# Altium PCB SPINNER_TWIN_STARS.PcbDoc (part 1 of 3)
Units mm, origin at the board's own origin, x right, y up, seen from the top; angles counter-clockwise.
Board outline 105 x 72 mm, 4 copper layers (Top_Elec, Mid Top Layer, Mid Bottom Layer, Bottom_GND), stack 0.742 mm thick; 199 components, 124 nets, 594 pads, 799 vias.
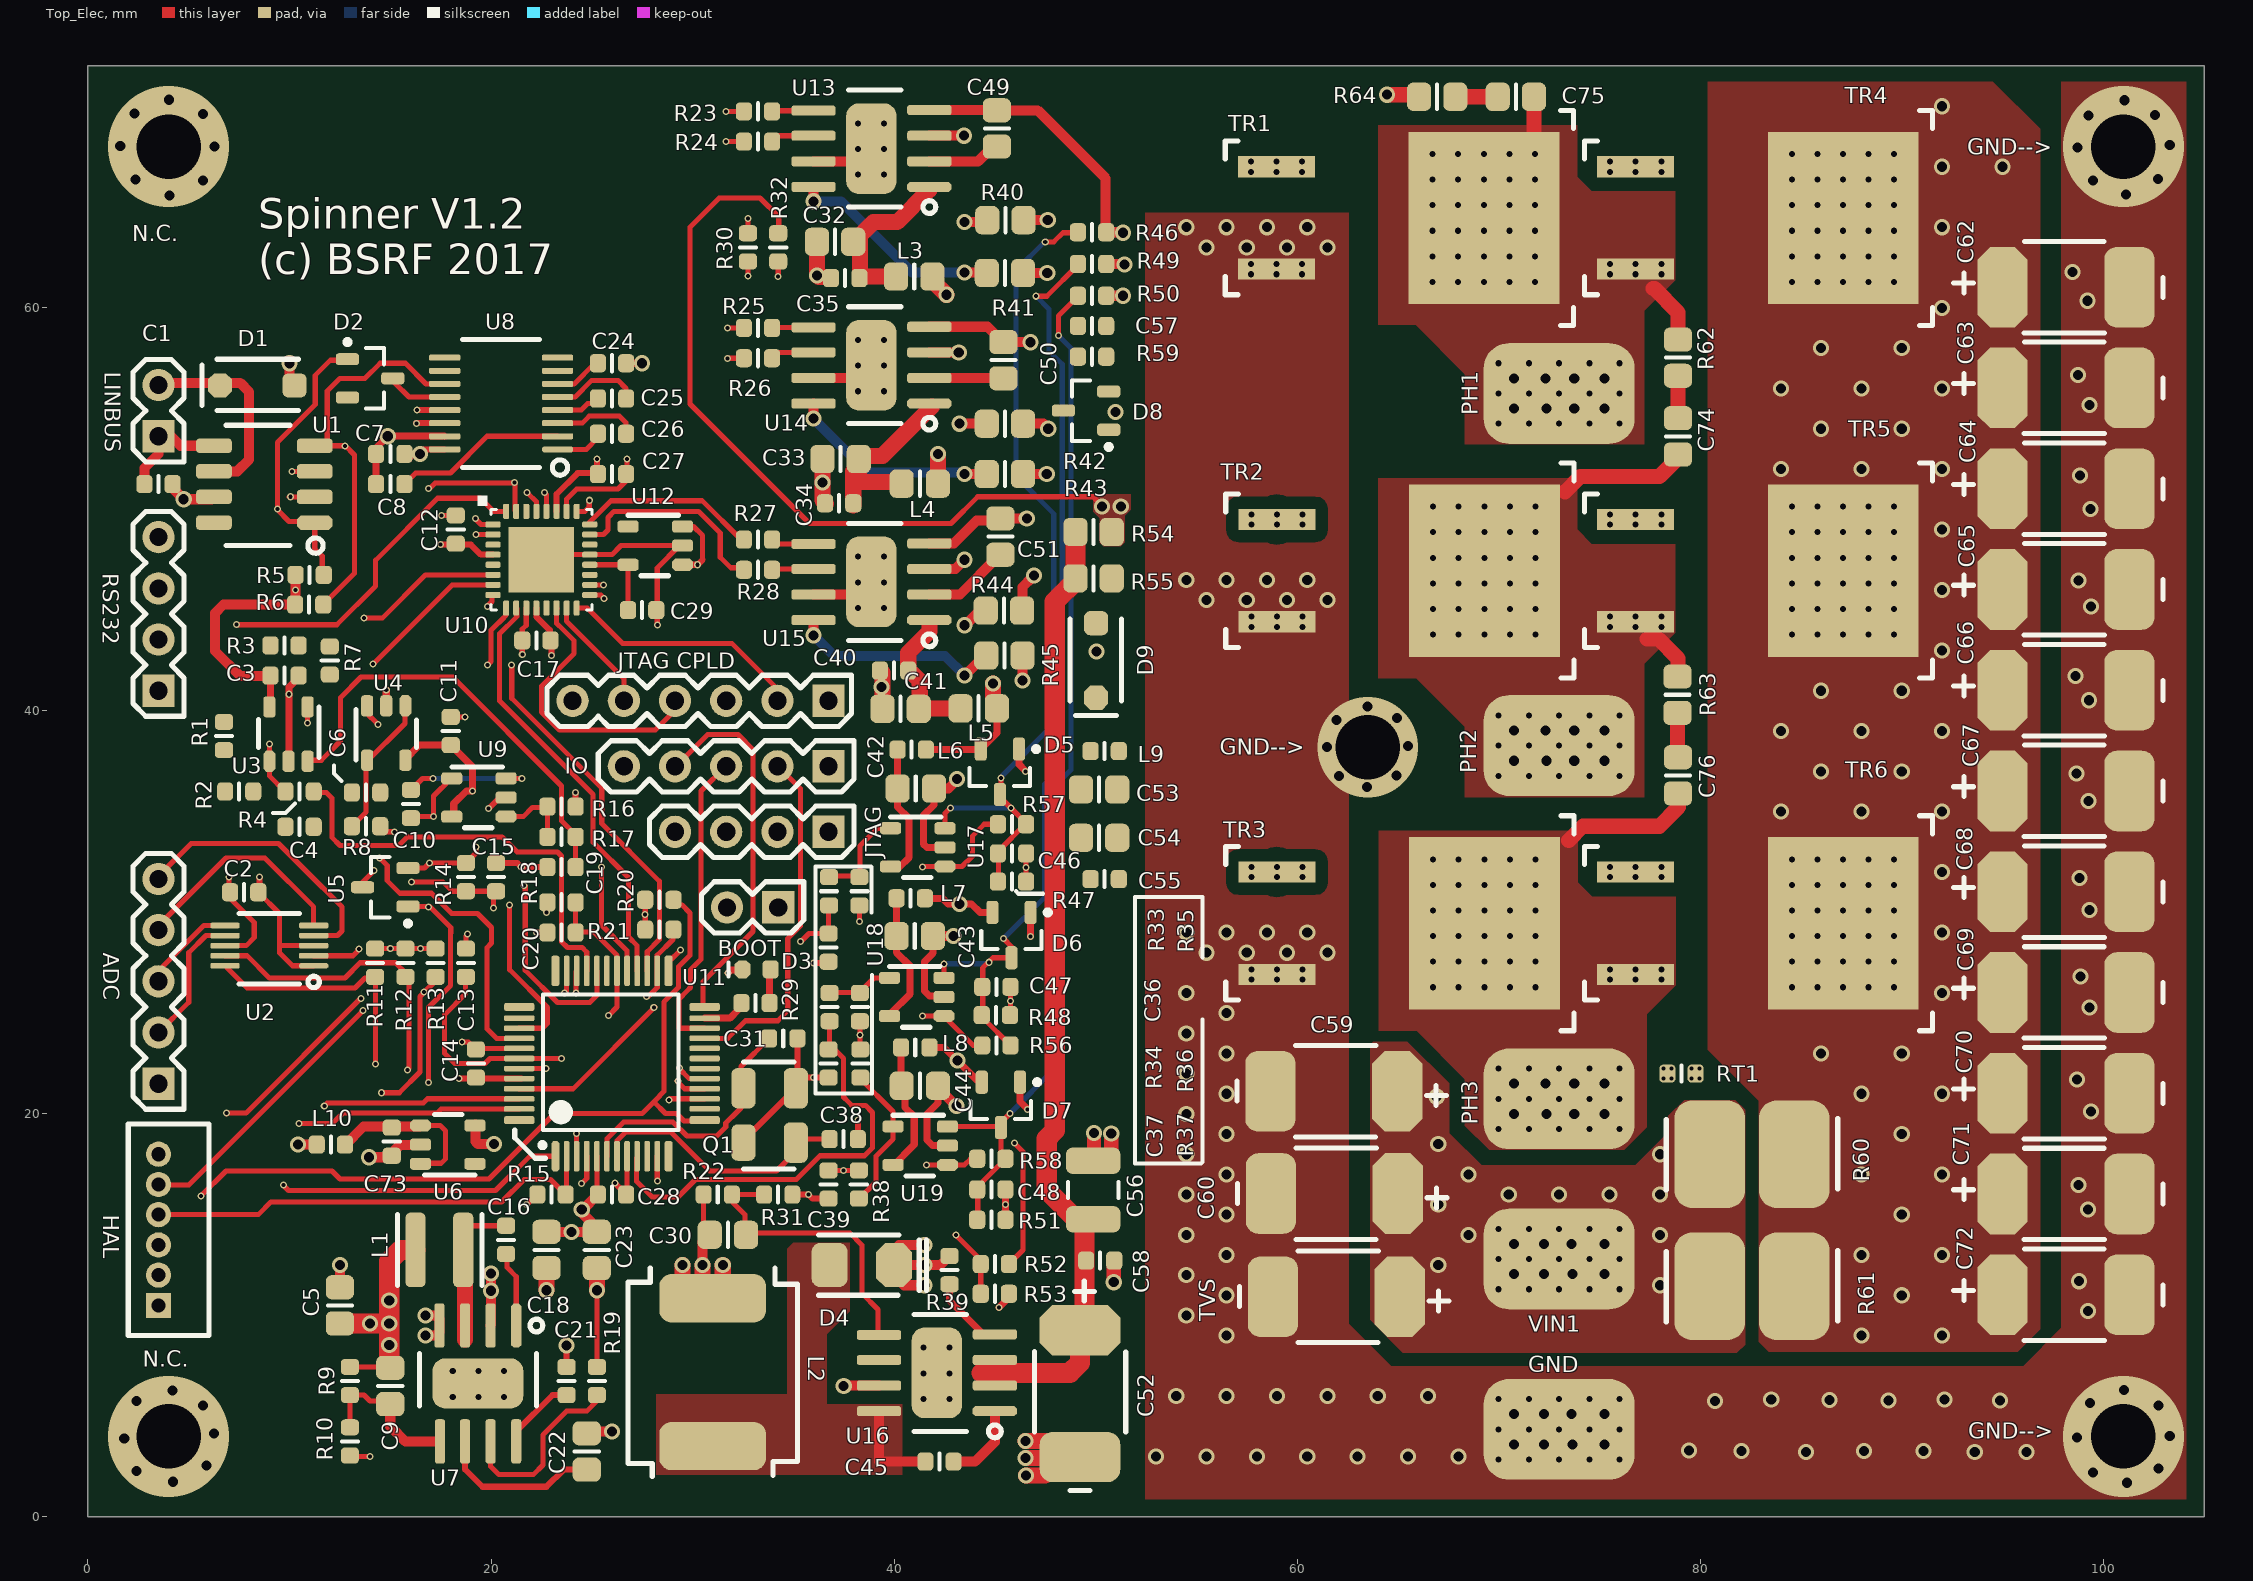
[diagram p0: Top_Elec view]
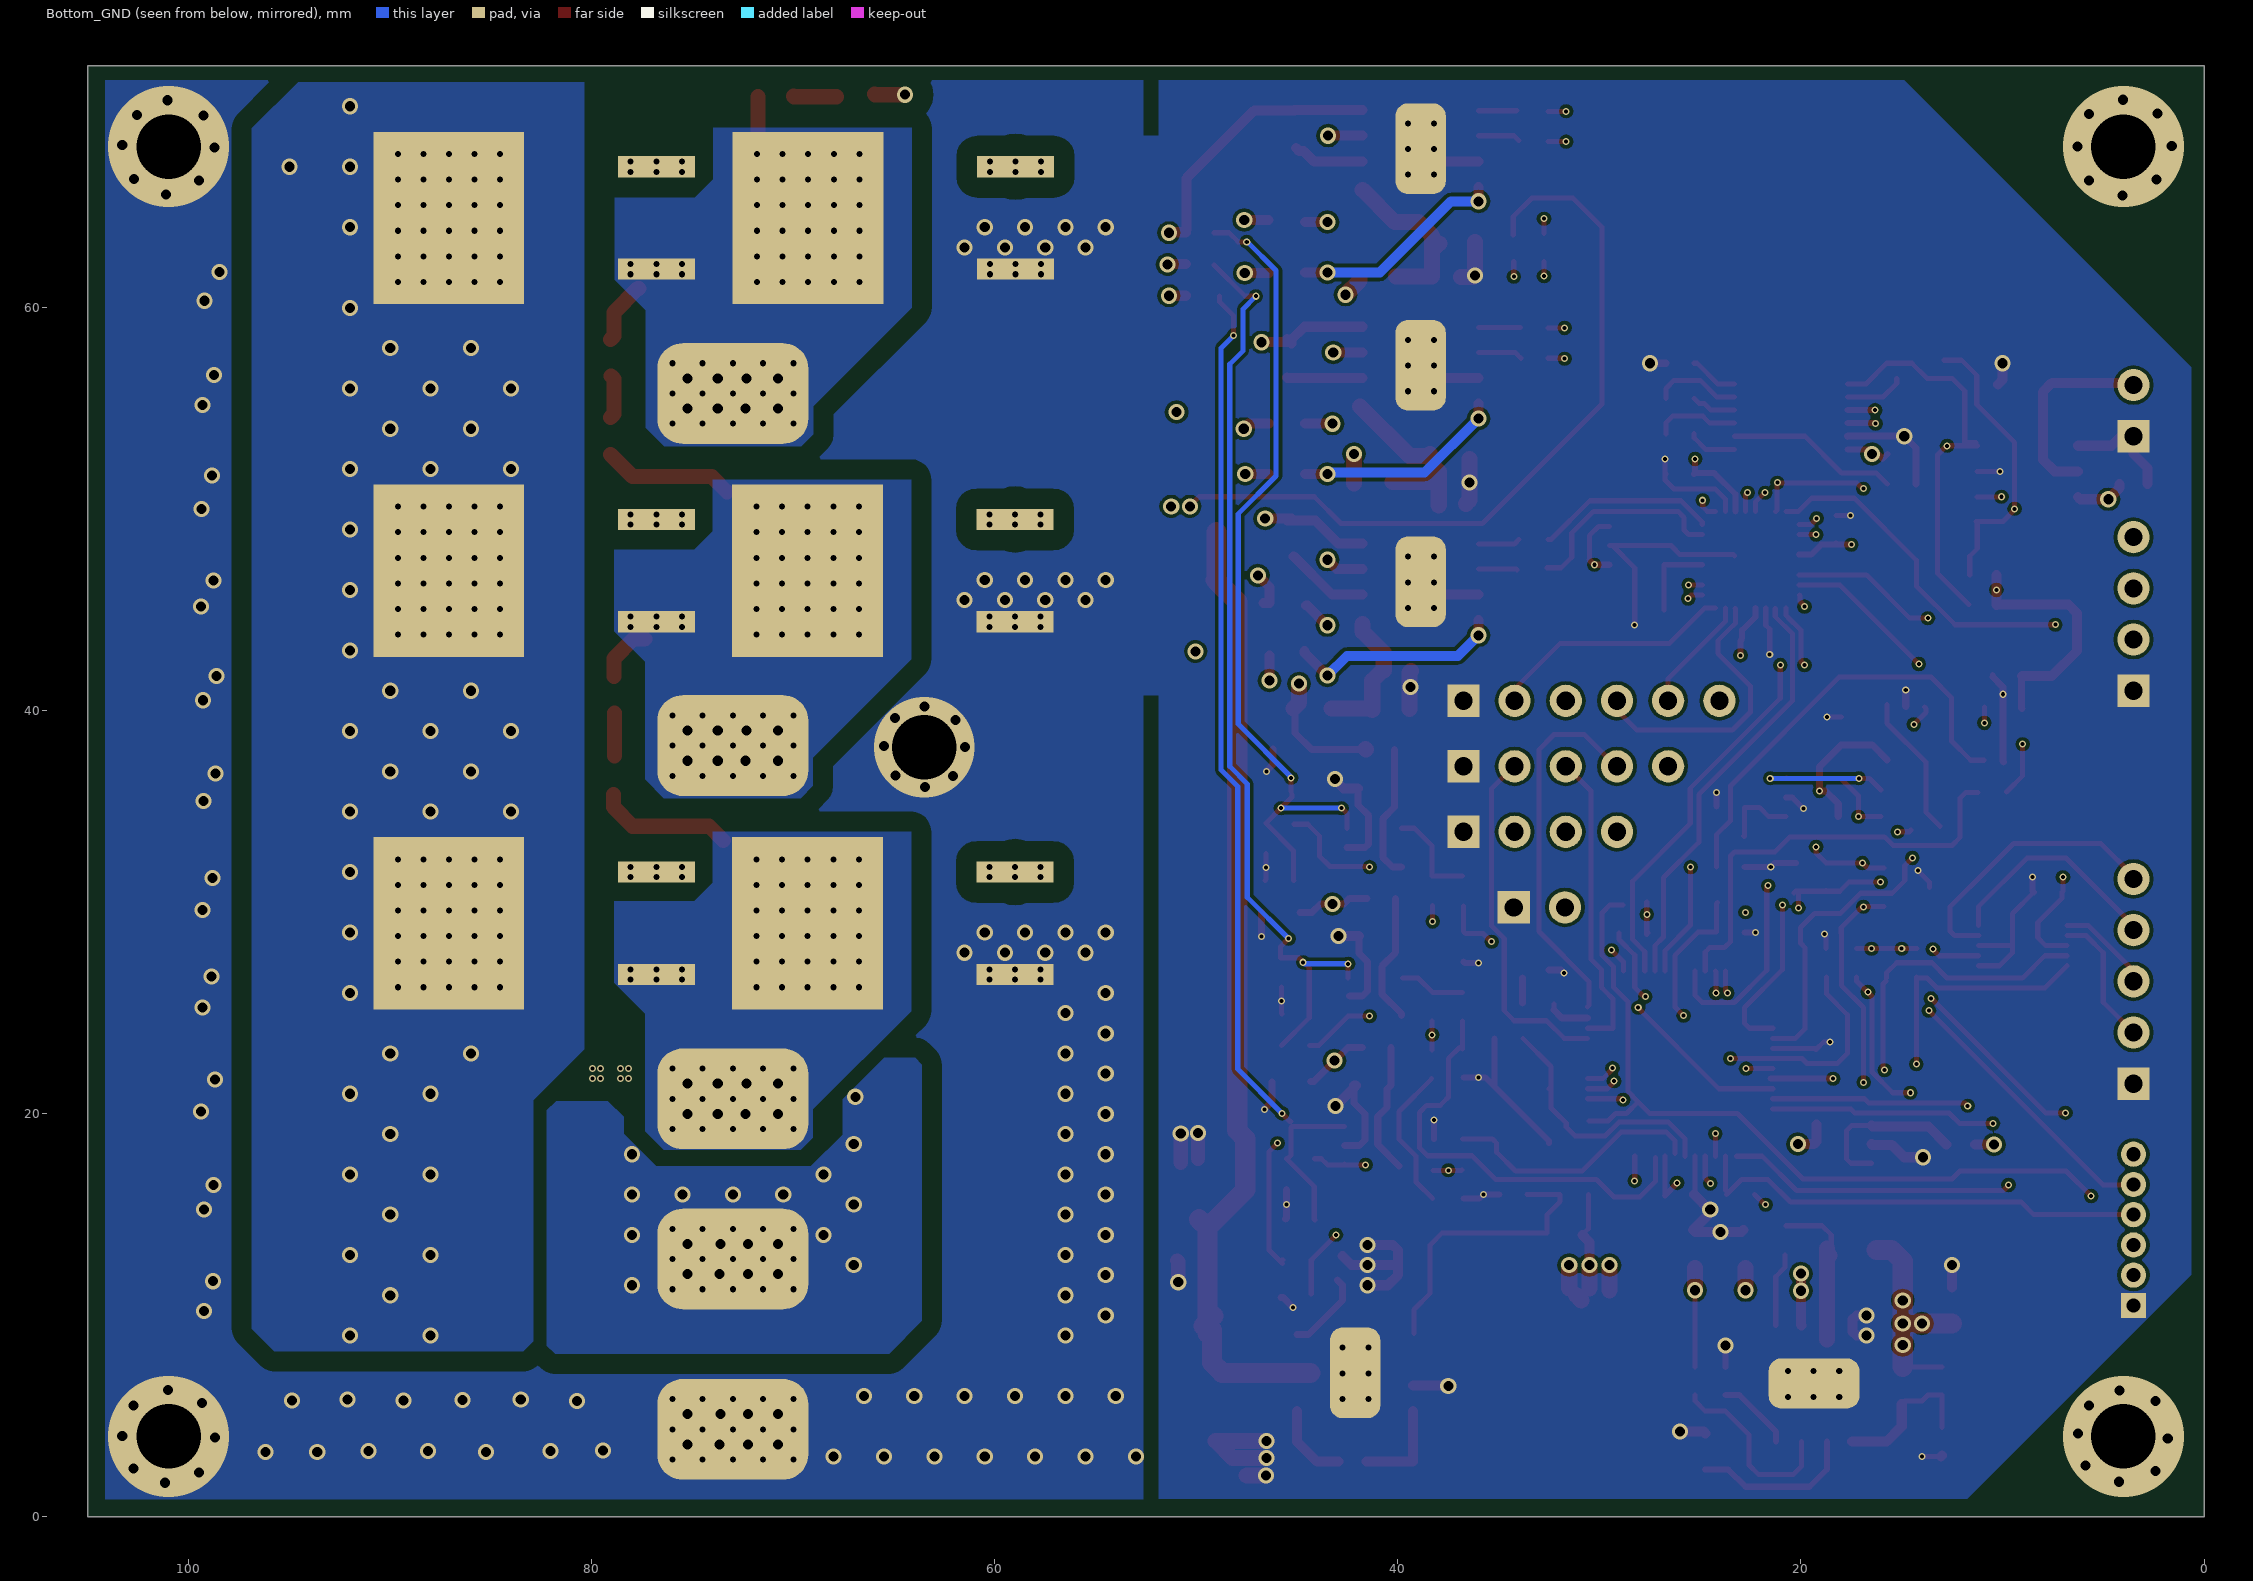
[diagram p1: Bottom_GND view, seen from below]
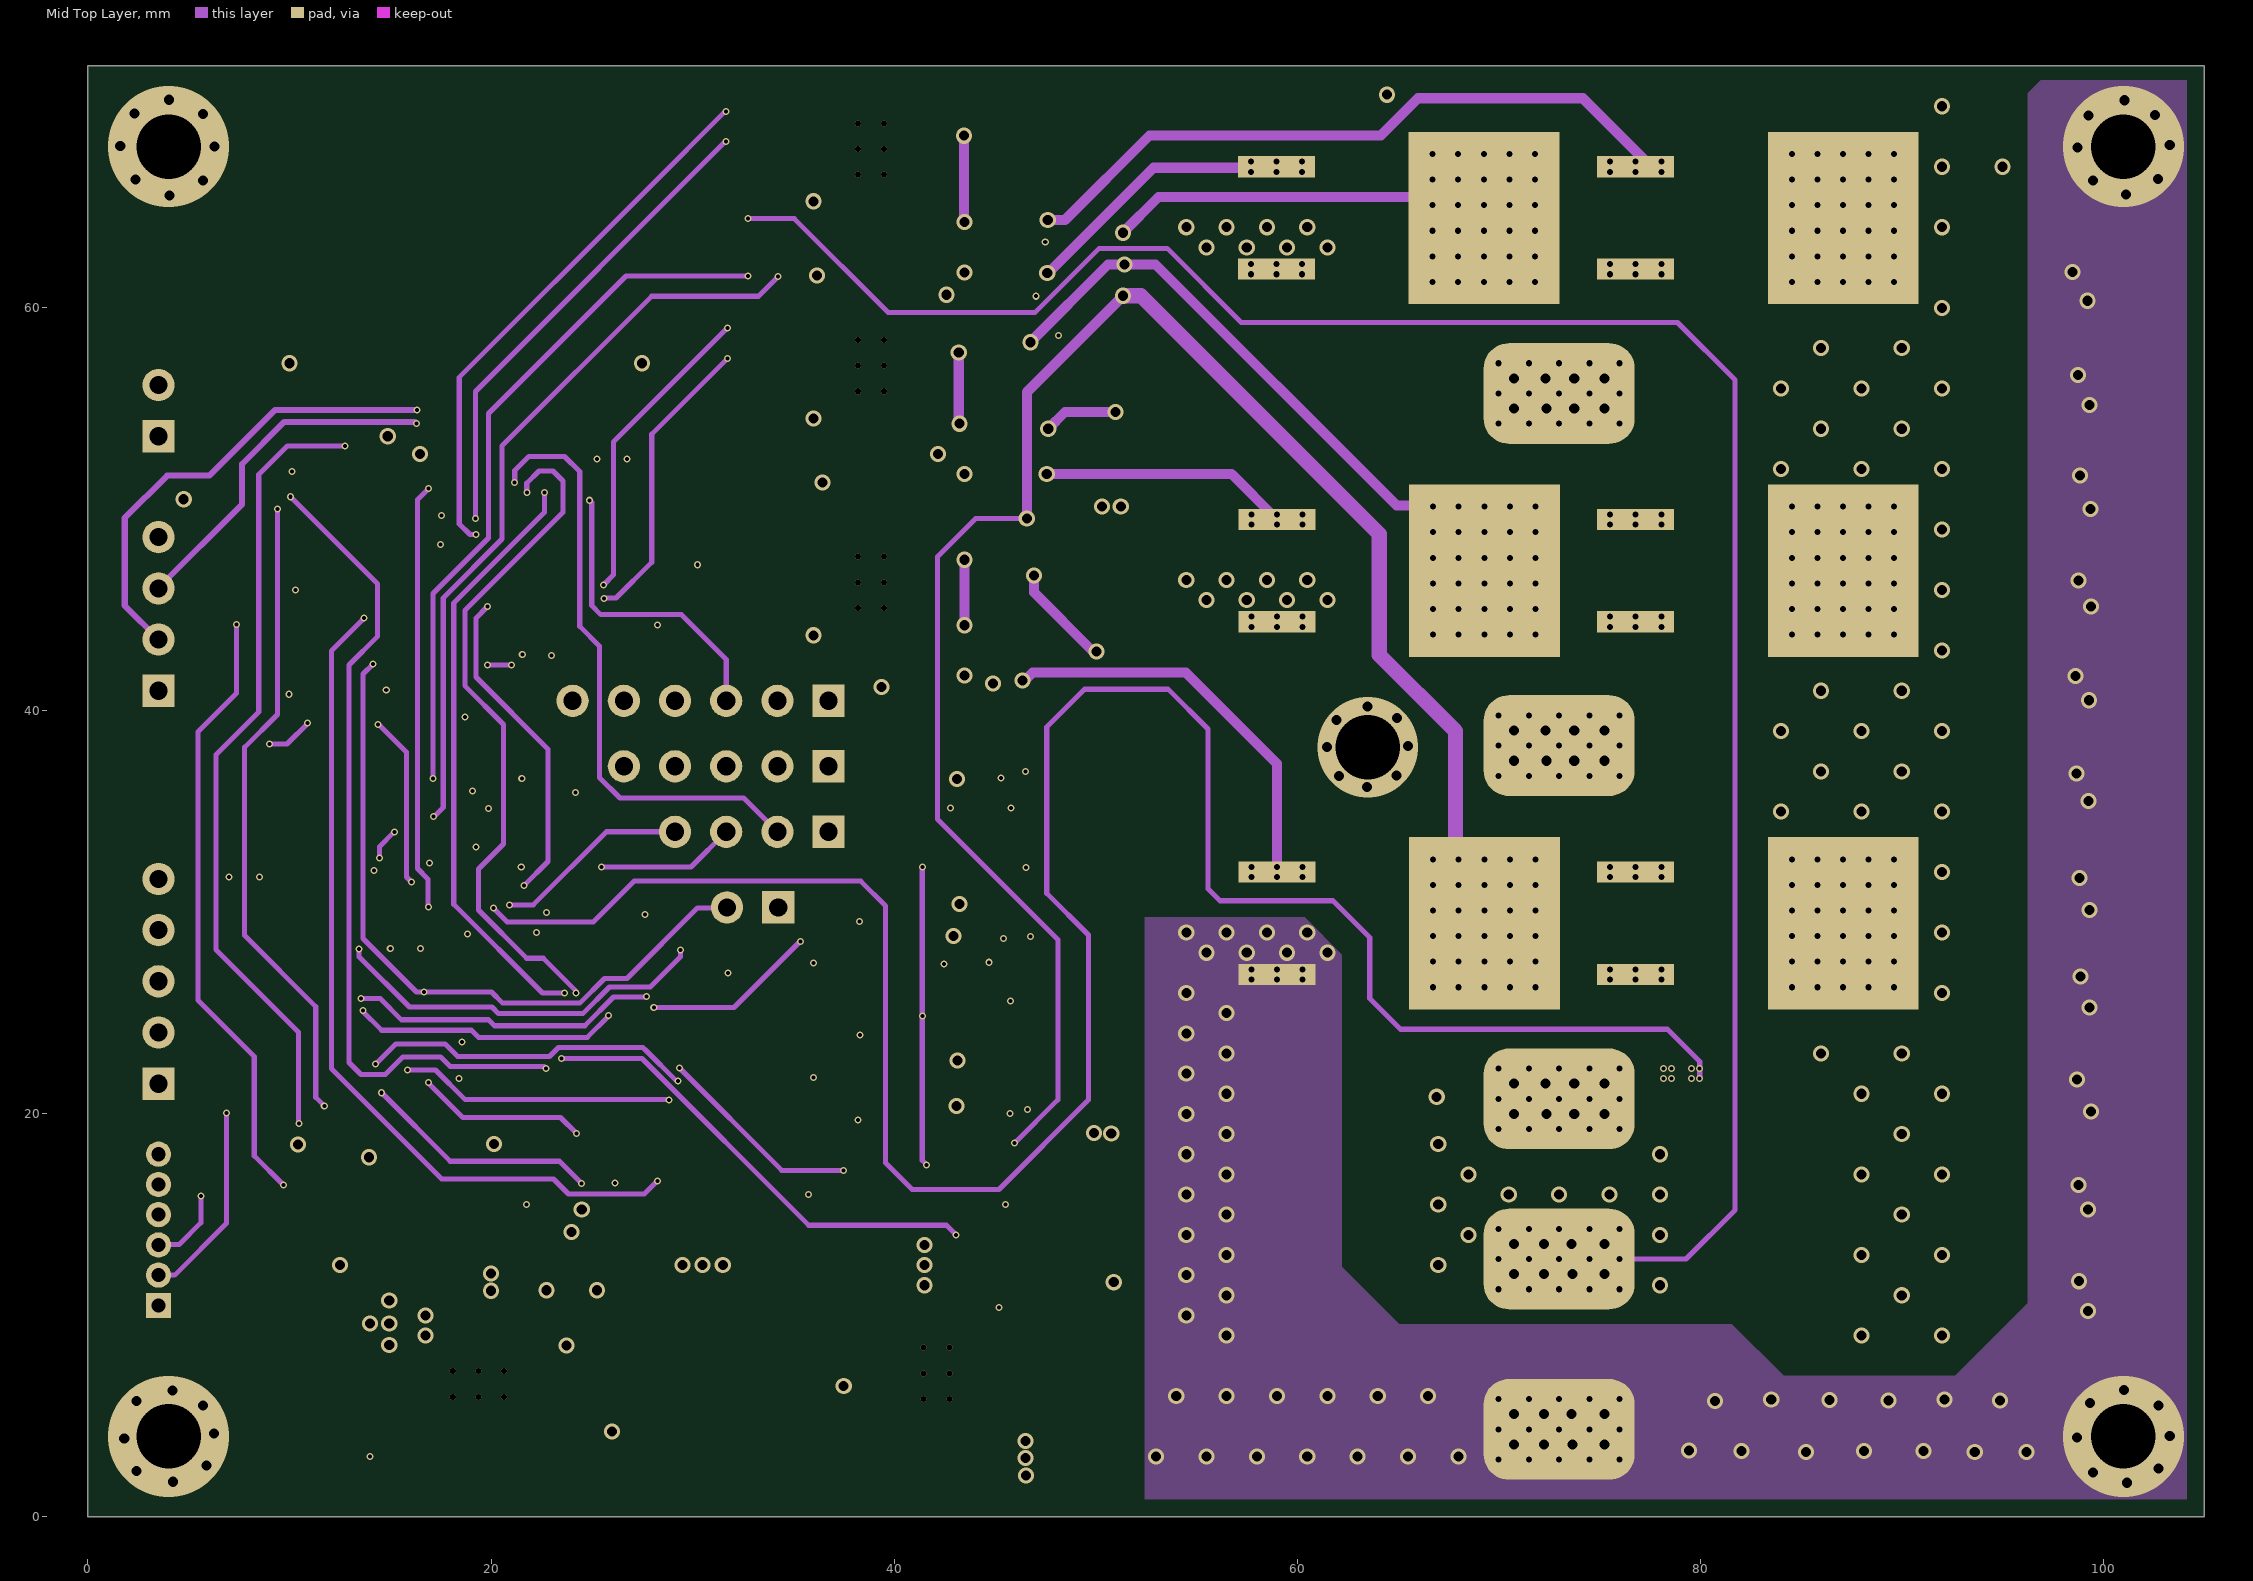
[diagram p2: Mid Top Layer]
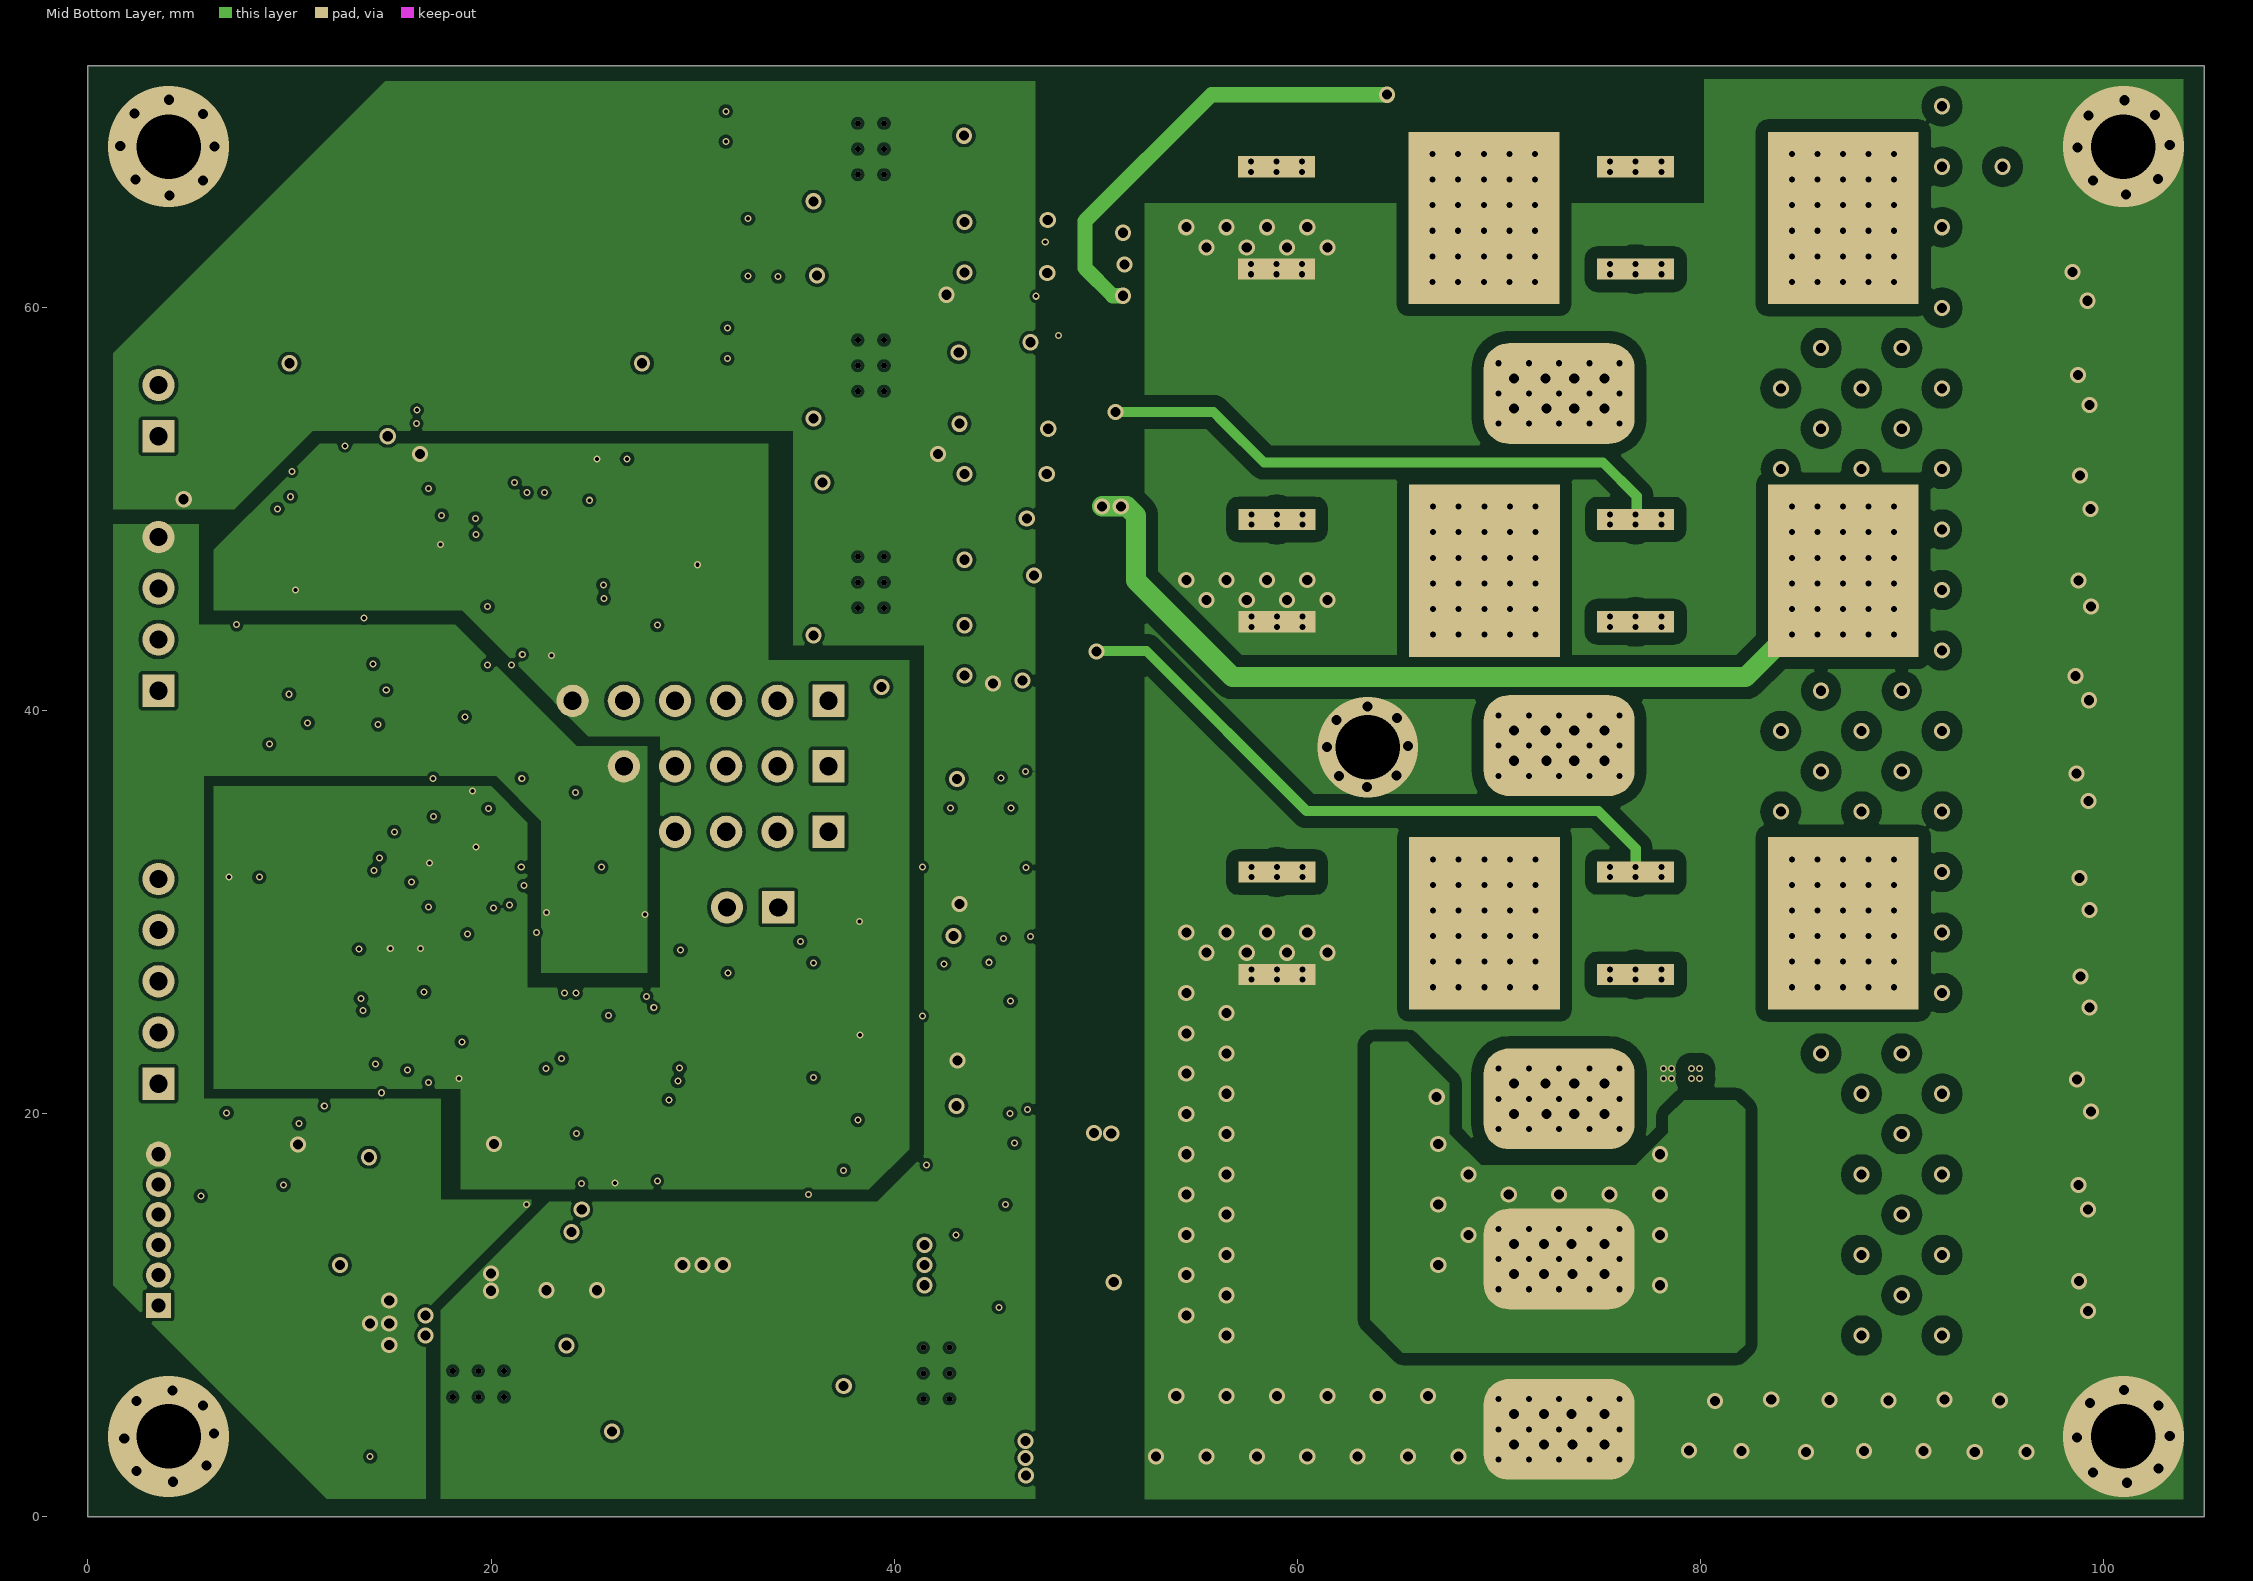
[diagram p3: Mid Bottom Layer]

## Layer stack, top to bottom
Top Solder Resist: solder mask 0.0102, Solder Resist, Dk 3.5
Top_Elec: signal copper 0.0175
Dielectric 1: core 0.254, FR-4, Dk 4.2
Mid Top Layer: signal copper 0.036
Dielectric 3: prepreg 0.127, FR-4, Dk 4.2
Mid Bottom Layer: signal copper 0.036
Dielectric 2: core 0.254, FR-4, Dk 4.2
Bottom_GND: signal copper 0.0175
Bottom Solder Resist: solder mask 0.0102, Solder Resist, Dk 3.5

## Board outline
0,0 105,0 105,72 0,72

## Design rules (kind name [scope] priority, off if disabled: settings)
Clearance BottomGND1 [InNamedPolygon('Bottom_GND1')] p1: gap=1 ignorepadtopadclearanceinfootprint=FALSE
Clearance Clearance_21 [InNamedPolygon('Bottom_GND1')] p2: gap=0.254 ignorepadtopadclearanceinfootprint=FALSE except(0: Arc-Hole Track-Hole SMDPad-Hole THPad-Hole Via-Hole Fill-Hole Poly-Hole Region-Hole Text-Hole)
Clearance Clearance_20 [InNamedPolygon('Bottom_GND1')] p3: gap=0.254 ignorepadtopadclearanceinfootprint=FALSE except(0: Arc-Hole Track-Hole SMDPad-Hole THPad-Hole Via-Hole Fill-Hole Poly-Hole Region-Hole Text-Hole)
Clearance Clearance_19 [InNamedPolygon('Bottom_GND1')] p4: gap=0.254 ignorepadtopadclearanceinfootprint=FALSE except(0: Arc-Hole Track-Hole SMDPad-Hole THPad-Hole Via-Hole Fill-Hole Poly-Hole Region-Hole Text-Hole)
Clearance Clearance_18 [InNamedPolygon('Mid_Bottom_GND1')] p5: gap=0.6 ignorepadtopadclearanceinfootprint=FALSE
Clearance Clearance_17 [InNamedPolygon('Top Elec-GND')] p6: gap=0.6 ignorepadtopadclearanceinfootprint=FALSE
Clearance Clearance_16 [InNamedPolygon('Mid_Bottom_GND1')] p7: gap=1 ignorepadtopadclearanceinfootprint=FALSE
Clearance Clearance_15 [InNamedPolygon('Mid_Bottom_GND1')] p8: gap=0.254 ignorepadtopadclearanceinfootprint=FALSE except(0: Arc-Hole Track-Hole SMDPad-Hole THPad-Hole Via-Hole Fill-Hole Poly-Hole Region-Hole Text-Hole)
Clearance Clearance_14 [InNamedPolygon('Mid Top GND')] p9: gap=0.5 ignorepadtopadclearanceinfootprint=FALSE
Clearance Clearance_13 [InNamedPolygon('Mid Bottom GND')] p10: gap=0.5 ignorepadtopadclearanceinfootprint=FALSE
Clearance Clearance_12 [InNamedPolygon('Mid Bottom GND')] p11: gap=0.5 ignorepadtopadclearanceinfootprint=FALSE
Clearance Clearance_11 [InNamedPolygon('GND')] p12: gap=0.254 ignorepadtopadclearanceinfootprint=FALSE except(0: Arc-Hole Track-Hole SMDPad-Hole THPad-Hole Via-Hole Fill-Hole Poly-Hole Region-Hole Text-Hole)
Clearance Clearance_10 [InNamedPolygon('GND')] p13: gap=0.254 ignorepadtopadclearanceinfootprint=FALSE
Clearance Clearance_9 [InNamedPolygon('GND')] p14: gap=0.5 ignorepadtopadclearanceinfootprint=FALSE
Clearance Clearance_8 [InNamedPolygon('GND')] p15: gap=1 ignorepadtopadclearanceinfootprint=FALSE
Clearance Clearance_7 [InNamedPolygon('PH2')] p16: gap=0.254 ignorepadtopadclearanceinfootprint=FALSE except(0: Arc-Hole Track-Hole SMDPad-Hole THPad-Hole Via-Hole Fill-Hole Poly-Hole Region-Hole Text-Hole)
Clearance Clearance_6 [InNamedPolygon('VIN')] p17: gap=0.254 ignorepadtopadclearanceinfootprint=FALSE except(0: Arc-Hole Track-Hole SMDPad-Hole THPad-Hole Via-Hole Fill-Hole Poly-Hole Region-Hole Text-Hole)
Clearance Clearance_5 [All] p18: gap=0.17 ignorepadtopadclearanceinfootprint=FALSE
Clearance Clearance_4 [InNamedPolygon('P48V') Or  InNamedPolygon('GND') Or  InNamedPolygon('PH3') Or  InNamedPolygon('PH3') Or  InNamedPolygon('PH1')] p19: gap=0.7 ignorepadtopadclearanceinfootprint=TRUE
Clearance Clearance_3 [InNamedPolygon('Top 48V') Or  InNamedPolygon('Mid Bottom P5V') Or  InNamedPolygon('PH3') Or  InNamedPolygon('PH3') Or  InNamedPolygon('PH1')] p20: gap=0.75 ignorepadtopadclearanceinfootprint=FALSE
Clearance Clearance_2 [InNamedPolygon('Top 48V') Or  InNamedPolygon('Mid Bottom P5V') Or  InNamedPolygon('PH1')] p21: gap=1 ignorepadtopadclearanceinfootprint=FALSE
Clearance Clearance_1 [InNamedPolygon('Mid Bottom P5V')] p22: gap=0.254 ignorepadtopadclearanceinfootprint=FALSE except(0: Arc-Hole Track-Hole SMDPad-Hole THPad-Hole Via-Hole Fill-Hole Poly-Hole Region-Hole Text-Hole)
Clearance CopperToBoard [InPolygon vs (IsTrack Or IsArc) And OnLayer('Keep-out Layer')] p23: gap=0.305 ignorepadtopadclearanceinfootprint=FALSE
Clearance ViaToCopper [IsVia vs InPolygon] p24: gap=0.305 ignorepadtopadclearanceinfootprint=FALSE
Clearance ViaToVia [IsVia vs IsVia] p25: gap=0.305 ignorepadtopadclearanceinfootprint=FALSE
Clearance PadToCopper [IsPad vs InPolygon] p26: gap=0.2 ignorepadtopadclearanceinfootprint=FALSE
Clearance PadToVia [IsPad vs IsVia] p27: gap=0.305 ignorepadtopadclearanceinfootprint=FALSE
Clearance PadToPad [IsPad vs IsPad] p28: gap=0.1 ignorepadtopadclearanceinfootprint=FALSE
Clearance RouteToPad_1 [IsTrack or IsArc vs IsVia] p29: gap=0.305 ignorepadtopadclearanceinfootprint=FALSE
Clearance RouteToPad [IsTrack Or IsArc vs IsPad] p30: gap=0.305 ignorepadtopadclearanceinfootprint=FALSE
Clearance RouteToRoute [IsTrack or IsArc vs IsTrack or IsArc] p31: gap=0.305 ignorepadtopadclearanceinfootprint=FALSE
Clearance [All] p32: gap=0.254 ignorepadtopadclearanceinfootprint=FALSE except(0: Arc-Hole Track-Hole SMDPad-Hole THPad-Hole Via-Hole Fill-Hole Poly-Hole Region-Hole Text-Hole)
ComponentClearance [All] p1: gap=0.2 collisioncheckmode=3 verticalgap=0.254 showdistances=TRUE
PolygonConnect PolygonConnect_43 [All] p1: connectstyle=Direct reliefconductorwidth=0.254 reliefentries=4 polygonreliefangle="90 Angle" airgapwidth=0.254
PolygonConnect PolygonConnect_42 [All vs IsNamedPolygon('Top Elec-GND')] p2: connectstyle=Direct reliefconductorwidth=0.254 reliefentries=4 polygonreliefangle="90 Angle" airgapwidth=0.254
PolygonConnect PolygonConnect_41 [All vs IsNamedPolygon('Top Elec-GND')] p3: connectstyle=Direct reliefconductorwidth=0.254 reliefentries=4 polygonreliefangle="90 Angle" airgapwidth=0.254
PolygonConnect PolygonConnect_40 [All vs IsNamedPolygon('Mid Top P48V')] p4: connectstyle=Direct reliefconductorwidth=0.254 reliefentries=4 polygonreliefangle="90 Angle" airgapwidth=0.254
PolygonConnect PolygonConnect_39 [All vs IsNamedPolygon('Mid Top Vin')] p5: connectstyle=Direct reliefconductorwidth=0.254 reliefentries=4 polygonreliefangle="90 Angle" airgapwidth=0.254
PolygonConnect PolygonConnect_38 [All vs IsNamedPolygon('Mid Top GND')] p6: connectstyle=Direct reliefconductorwidth=0.254 reliefentries=4 polygonreliefangle="90 Angle" airgapwidth=0.254
PolygonConnect PolygonConnect_37 [All vs IsNamedPolygon('Mid Bottom GND')] p7: connectstyle=Direct reliefconductorwidth=0.254 reliefentries=4 polygonreliefangle="90 Angle" airgapwidth=0.254
PolygonConnect PolygonConnect_36 [All vs IsNamedPolygon('Top Elec-98')] p8: connectstyle=Direct reliefconductorwidth=0.254 reliefentries=4 polygonreliefangle="90 Angle" airgapwidth=0.254
PolygonConnect PolygonConnect_35 [All vs IsNamedPolygon('Mid Bottom GND')] p9: connectstyle=Direct reliefconductorwidth=0.254 reliefentries=4 polygonreliefangle="90 Angle" airgapwidth=0.254
PolygonConnect PolygonConnect_34 [All vs IsNamedPolygon('Bottom_GNDVin')] p10: connectstyle=Direct reliefconductorwidth=0.254 reliefentries=4 polygonreliefangle="90 Angle" airgapwidth=0.254
PolygonConnect PolygonConnect_33 [All vs IsNamedPolygon('Bottom_GNDVin')] p11: connectstyle=Direct reliefconductorwidth=0.254 reliefentries=4 polygonreliefangle="90 Angle" airgapwidth=0.254
PolygonConnect PolygonConnect_32 [All vs IsNamedPolygon('Mid Bottom PH3')] p12: connectstyle=Direct reliefconductorwidth=0.254 reliefentries=4 polygonreliefangle="90 Angle" airgapwidth=0.254
PolygonConnect PolygonConnect_31 [All vs IsNamedPolygon('Mid Bottom PH2')] p13: connectstyle=Direct reliefconductorwidth=0.254 reliefentries=4 polygonreliefangle="90 Angle" airgapwidth=0.254
PolygonConnect PolygonConnect_30 [All vs IsNamedPolygon('Mid Bottom PH1')] p14: connectstyle=Direct reliefconductorwidth=0.254 reliefentries=4 polygonreliefangle="90 Angle" airgapwidth=0.254
PolygonConnect PolygonConnect_29 [All vs IsNamedPolygon('Mid Bottom P48V')] p15: connectstyle=Direct reliefconductorwidth=0.254 reliefentries=4 polygonreliefangle="90 Angle" airgapwidth=0.254
PolygonConnect PolygonConnect_28 [All vs IsNamedPolygon('GND_L03_P035')] p16: connectstyle=Direct reliefconductorwidth=0.254 reliefentries=4 polygonreliefangle="90 Angle" airgapwidth=0.254
PolygonConnect PolygonConnect_27 [All vs IsNamedPolygon('GND_L03_P035')] p17: thpad.connectstyle=NoConnect thpad.reliefconductorwidth=0.254 thpad.reliefentries=4 thpad.polygonreliefangle="90 Angle" thpad.airgapwidth=0.254 smdpad.connectstyle=Direct smdpad.reliefconductorwidth=0.254 smdpad.reliefentries=4 smdpad.polygonreliefangle="90 Angle" smdpad.airgapwidth=0.254 via.connectstyle=Direct via.reliefconductorwidth=0.254 via.reliefentries=4 via.polygonreliefangle="90 Angle" via.airgapwidth=0.254
PolygonConnect PolygonConnect_26 [All vs IsNamedPolygon('Mid Bottom P3.3V')] p18: connectstyle=Direct reliefconductorwidth=0.254 reliefentries=4 polygonreliefangle="90 Angle" airgapwidth=0.254
PolygonConnect PolygonConnect_25 [All vs IsNamedPolygon('Mid Bottom P12V')] p19: connectstyle=Direct reliefconductorwidth=0.254 reliefentries=4 polygonreliefangle="90 Angle" airgapwidth=0.254
PolygonConnect PolygonConnect_24 [All vs IsNamedPolygon('PH1')] p20: connectstyle=Direct reliefconductorwidth=0.254 reliefentries=4 polygonreliefangle="90 Angle" airgapwidth=0.254
PolygonConnect PolygonConnect_23 [All vs IsNamedPolygon('PH1')] p21: connectstyle=Direct reliefconductorwidth=0.254 reliefentries=4 polygonreliefangle="90 Angle" airgapwidth=0.254
PolygonConnect PolygonConnect_22 [All vs IsNamedPolygon('GND')] p22: connectstyle=Direct reliefconductorwidth=0.254 reliefentries=4 polygonreliefangle="90 Angle" airgapwidth=0.254
PolygonConnect PolygonConnect_21 [All vs IsNamedPolygon('GND')] p23: thpad.connectstyle=Relief thpad.reliefconductorwidth=0.254 thpad.reliefentries=4 thpad.polygonreliefangle="90 Angle" thpad.airgapwidth=0.254 smdpad.connectstyle=Direct smdpad.reliefconductorwidth=0.254 smdpad.reliefentries=4 smdpad.polygonreliefangle="90 Angle" smdpad.airgapwidth=0.254 via.connectstyle=Direct via.reliefconductorwidth=0.254 via.reliefentries=4 via.polygonreliefangle="90 Angle" via.airgapwidth=0.254
PolygonConnect PolygonConnect_20 [All vs IsNamedPolygon('GND')] p24: thpad.connectstyle=Relief thpad.reliefconductorwidth=0.254 thpad.reliefentries=4 thpad.polygonreliefangle="90 Angle" thpad.airgapwidth=0.254 smdpad.connectstyle=Direct smdpad.reliefconductorwidth=0.254 smdpad.reliefentries=4 smdpad.polygonreliefangle="90 Angle" smdpad.airgapwidth=0.254 via.connectstyle=Direct via.reliefconductorwidth=0.254 via.reliefentries=4 via.polygonreliefangle="90 Angle" via.airgapwidth=0.254
PolygonConnect PolygonConnect_19 [All vs IsNamedPolygon('GND')] p25: thpad.connectstyle=Relief thpad.reliefconductorwidth=0.254 thpad.reliefentries=4 thpad.polygonreliefangle="90 Angle" thpad.airgapwidth=0.254 smdpad.connectstyle=Direct smdpad.reliefconductorwidth=0.254 smdpad.reliefentries=4 smdpad.polygonreliefangle="90 Angle" smdpad.airgapwidth=0.254 via.connectstyle=Relief via.reliefconductorwidth=0.254 via.reliefentries=4 via.polygonreliefangle="90 Angle" via.airgapwidth=0.254
PolygonConnect PolygonConnect_18 [All vs IsNamedPolygon('GND')] p26: connectstyle=Direct reliefconductorwidth=0.254 reliefentries=4 polygonreliefangle="90 Angle" airgapwidth=0.254
PolygonConnect PolygonConnect_17 [All vs IsNamedPolygon('GND')] p27: thpad.connectstyle=Relief thpad.reliefconductorwidth=0.254 thpad.reliefentries=4 thpad.polygonreliefangle="90 Angle" thpad.airgapwidth=0.254 smdpad.connectstyle=Direct smdpad.reliefconductorwidth=0.254 smdpad.reliefentries=4 smdpad.polygonreliefangle="90 Angle" smdpad.airgapwidth=0.254 via.connectstyle=Relief via.reliefconductorwidth=0.254 via.reliefentries=4 via.polygonreliefangle="90 Angle" via.airgapwidth=0.254
PolygonConnect PolygonConnect_16 [All vs IsNamedPolygon('PH1')] p28: thpad.connectstyle=Relief thpad.reliefconductorwidth=0.254 thpad.reliefentries=4 thpad.polygonreliefangle="90 Angle" thpad.airgapwidth=0.254 smdpad.connectstyle=Direct smdpad.reliefconductorwidth=0.254 smdpad.reliefentries=4 smdpad.polygonreliefangle="90 Angle" smdpad.airgapwidth=0.254 via.connectstyle=Relief via.reliefconductorwidth=0.254 via.reliefentries=4 via.polygonreliefangle="90 Angle" via.airgapwidth=0.254
PolygonConnect PolygonConnect_15 [All vs IsNamedPolygon('GND')] p29: connectstyle=Relief reliefconductorwidth=0.254 reliefentries=4 polygonreliefangle="90 Angle" airgapwidth=0.254
PolygonConnect PolygonConnect_14 [All vs IsNamedPolygon('PH2')] p30: connectstyle=Direct reliefconductorwidth=0.254 reliefentries=4 polygonreliefangle="90 Angle" airgapwidth=0.254
PolygonConnect PolygonConnect_13 [All vs IsNamedPolygon('VIN')] p31: connectstyle=Direct reliefconductorwidth=0.254 reliefentries=4 polygonreliefangle="90 Angle" airgapwidth=0.254
PolygonConnect PolygonConnect_12 [All vs IsNamedPolygon('VIN')] p32: connectstyle=Direct reliefconductorwidth=0.254 reliefentries=4 polygonreliefangle="90 Angle" airgapwidth=0.254
PolygonConnect PolygonConnect_11 [All vs IsNamedPolygon('VIN')] p33: connectstyle=Direct reliefconductorwidth=0.254 reliefentries=4 polygonreliefangle="90 Angle" airgapwidth=0.254
PolygonConnect PolygonConnect_10 [All vs IsNamedPolygon('PH3')] p34: connectstyle=Direct reliefconductorwidth=0.254 reliefentries=4 polygonreliefangle="90 Angle" airgapwidth=0.254
PolygonConnect PolygonConnect_9 [All vs IsNamedPolygon('PH3')] p35: connectstyle=Direct reliefconductorwidth=0.254 reliefentries=4 polygonreliefangle="90 Angle" airgapwidth=0.254
PolygonConnect PolygonConnect_8 [All vs IsNamedPolygon('P48V')] p36: connectstyle=Direct reliefconductorwidth=0.254 reliefentries=4 polygonreliefangle="90 Angle" airgapwidth=0.254
PolygonConnect PolygonConnect_7 [All vs IsNamedPolygon('P48V') Or  IsNamedPolygon('GND') Or  IsNamedPolygon('PH3') Or  IsNamedPolygon('PH3') Or  IsNamedPolygon('PH1')] p37: connectstyle=Direct reliefconductorwidth=0.254 reliefentries=4 polygonreliefangle="90 Angle" airgapwidth=0.254
PolygonConnect PolygonConnect_6 [All vs IsNamedPolygon('Top 48V') Or  IsNamedPolygon('Mid Bottom P5V') Or  IsNamedPolygon('PH3') Or  IsNamedPolygon('PH3') Or  IsNamedPolygon('PH1')] p38: connectstyle=Direct reliefconductorwidth=0.254 reliefentries=4 polygonreliefangle="90 Angle" airgapwidth=0.254
PolygonConnect PolygonConnect_5 [All vs IsNamedPolygon('Top 48V') Or  IsNamedPolygon('Mid Bottom P5V') Or  IsNamedPolygon('PH1')] p39: connectstyle=Direct reliefconductorwidth=0.254 reliefentries=4 polygonreliefangle="90 Angle" airgapwidth=0.254
PolygonConnect PolygonConnect_4 [All vs IsNamedPolygon('Mid Bottom P5V')] p40: connectstyle=Direct reliefconductorwidth=0.254 reliefentries=4 polygonreliefangle="90 Angle" airgapwidth=0.254
PolygonConnect PolygonConnect_3 [All vs IsNamedPolygon('Mid Bottom P5V')] p41: thpad.connectstyle=Direct thpad.reliefconductorwidth=0.254 thpad.reliefentries=4 thpad.polygonreliefangle="90 Angle" thpad.airgapwidth=0.254 smdpad.connectstyle=Direct smdpad.reliefconductorwidth=0.254 smdpad.reliefentries=4 smdpad.polygonreliefangle="90 Angle" smdpad.airgapwidth=0.254 via.connectstyle=Relief via.reliefconductorwidth=0.254 via.reliefentries=4 via.polygonreliefangle="90 Angle" via.airgapwidth=0.254
PolygonConnect PolygonConnect_2 [All vs IsNamedPolygon('Mid Bottom P5V')] p42: thpad.connectstyle=Direct thpad.reliefconductorwidth=0.254 thpad.reliefentries=4 thpad.polygonreliefangle="90 Angle" thpad.airgapwidth=0.254 smdpad.connectstyle=Direct smdpad.reliefconductorwidth=0.254 smdpad.reliefentries=4 smdpad.polygonreliefangle="90 Angle" smdpad.airgapwidth=0.254 via.connectstyle=Relief via.reliefconductorwidth=0.254 via.reliefentries=4 via.polygonreliefangle="90 Angle" via.airgapwidth=0.254
PolygonConnect PolygonConnect_1 [All vs IsNamedPolygon('Mid Bottom P5V')] p43: thpad.connectstyle=Direct thpad.reliefconductorwidth=0.254 thpad.reliefentries=4 thpad.polygonreliefangle="90 Angle" thpad.airgapwidth=0.254 smdpad.connectstyle=Relief smdpad.reliefconductorwidth=0.254 smdpad.reliefentries=4 smdpad.polygonreliefangle="90 Angle" smdpad.airgapwidth=0.254 via.connectstyle=Relief via.reliefconductorwidth=0.254 via.reliefentries=4 via.polygonreliefangle="90 Angle" via.airgapwidth=0.254
PolygonConnect [All] p44: connectstyle=Relief reliefconductorwidth=0.254 reliefentries=4 polygonreliefangle="90 Angle" airgapwidth=0.254
RoutingVias [All] p1: holewidth=0.3 width=0.7 viastyle="Through Hole" minholewidth=0.2 minwidth=0.2 maxholewidth=1 maxwidth=1
SolderMaskExpansion [All] p1: expansion=0.07
Width [All] p1: maxlimit=5 minlimit=0.254 preferedwidth=0.254
29 further rules are at their usual default settings.

## Classes and differential pairs
component class CONTROL: ADC BOOT C1 C2 C3 C4 C6 C7 C8 C11 C12 C13 C15 C17 C20 C24 C25 C26 C27 C28 C29 C31 C38 D1 D2 D3 HAL IO JTAG "JTAG CPLD" LINBUS Q1 R1 R2 R3 R4 R5 R6 R7 R8 R11 R12 R13 R15 R18 R20 R21 R29 RS232 U1 U2 U3 U4 U5 U8 U10 U11 U12
component class POWER: C5 C9 C10 C14 C16 C18 C19 C21 C22 C23 C30 C32 C33 C34 C35 C36 C37 C39 C40 C41 C42 C43 C44 C45 C46 C47 C48 C49 C50 C51 C52 C53 C54 C55 C56 C57 C58 C59 C60 C62 C63 C64 C65 C66 C67 C68 C69 C70 C71 C72 C73 C74 C75 C76 D4 D5 D6 D7 D8 D9 GND L1 L2 L3 L4 L5 L6 L7 L8 L9 L10 PH1 PH2 PH3 R9 R10 R14 R16 R17 R19 R22 R23 R24 R25 R26 R27 R28 R30 R31 R32 R33 R34 R35 R36 R37 R38 R39 R40 R41 R42 R43 R44 R45 R46 R47 R48 R49 R50 R51 R52 R53 R54 R55 R56 R57 R58 R59 R60 R61 R62 R63 R64 RT1 TR1 TR2 TR3 TR4 TR5 TR6 TVS U6 U7 U9 U13 U14 U15 U16 U17 U18 U19 U20 VIN VIN1

## Components (designator, comment, footprint, x,y, rotation, side; value= is the part's Value field where it differs from the comment)
ADC "*" CON-SRS-5-0254 3.5,21.5 r90 top locked
BOOT "2.54mm HEADER 2 PIN" CON-SRS-2-0254 34.25,30.25 r180 top locked
C1 "10uF" 1608[0603] 3.5,51.25 r180 top locked
C2 "10uF" 1608[0603] 7.75,31 r180 top locked
C3 "10uF" 1608[0603] 9.75,41.75 r0 top locked
C4 "NA" 1608[0603] 10.5,34.25 r180 top locked
C5 "4.7uF" 0805_N 12.5,10.5 r90 top locked
C6 "NA" 1608[0603] 13.8,35.95 r0 top locked
C7 "10uF" 1608[0603] 15,52.75 r180 top locked
C8 "100nF" 1608[0603] 15,51.25 r0 top locked
C9 "22pF" 0805_N 15,6.5 r270 top locked
C10 "10uF" 1608[0603] 16.025,35.375 r270 top locked
C11 "10uF" 1608[0603] 18,39 r90 top locked
C12 "10uF" 1608[0603] 18.25,49 r270 top locked
C13 "10uF" 1608[0603] 18.75,27.5 r90 top locked
C14 "10uF" 1608[0603] 19.25,22.5 r90 top locked
C15 "10uF" 1608[0603] 20.25,31.75 r90 top locked
C16 "100nF" 1608[0603] 20.75,13.75 r90 top locked
C17 "10uF" 1608[0603] 22.25,43.5 r180 top locked
C18 "4.7uF" 0805_N 22.75,13.25 r90 top locked
C19 "10uF" 1608[0603] 23.5,32.25 r180 top locked
C20 "10uF" 1608[0603] 23.5,29 r180 top locked
C21 "8.2nF" 1608[0603] 23.75,6.75 r270 top locked
C22 "470nF" 0805_N 24.75,3.25 r90 top locked
C23 "4.7uF" 0805_N 25.25,13.25 r90 top locked
C24 "100nF" 1608[0603] 26,57.25 r180 top locked
C25 "100nF" 1608[0603] 26,55.5 r180 top locked
C26 "100nF" 1608[0603] 26,53.75 r180 top locked
C27 "10uF" 1608[0603] 26,51.75 r0 top locked
C28 "10uF" 1608[0603] 26,16 r180 top locked
C29 "10uF" 1608[0603] 27.5,45 r0 top locked
C30 "12pF" 0805_N 31.75,14 r0 top locked
C31 "10pF" 1608[0603] 34.5,23.75 r180 top locked
C32 "4.7uF" 0805_N 37.075,63.275 r0 top locked
C33 "4.7uF" 0805_N 37.35,52.5 r0 top locked
C34 "100nF" 1608[0603] 37.275,50.3 r0 top locked
C35 "100nF" 1608[0603] 37.575,61.475 r0 top locked
C36 "NA" 1608[0603] 36.75,28.25 r270 top locked
C37 "NA" 1608[0603] 36.75,22.5 r270 top locked
C38 "10pF" 1608[0603] 37.5,18.75 r180 top locked
C39 "NA" 1608[0603] 36.75,16.5 r270 top locked
C40 "100nF" 1608[0603] 40,42 r0 top locked
C41 "4.7uF" 0805_N 40.325,40.1 r0 top locked
C42 "4.7uF" 0805_N 41.075,36.15 r0 top locked
C43 "4.7uF" 0805_N 41.025,28.825 r0 top locked
C44 "4.7uF" 0805_N 41.275,21.4 r0 top locked
C45 "100nF" 1608[0603] 42.25,2.75 r180 top locked
C46 "NA" 1608[0603] 45.85,32.925 r0 top locked
C47 "NA" 1608[0603] 45.075,26.3 r0 top locked
C48 "NA" 1608[0603] 44.825,16.25 r0 top locked
C49 "4.7uF" 0805_N 45.1,68.9 r90 top locked
C50 "4.7uF" 0805_N 45.425,57.4 r90 top locked
C51 "4.7uF" 0805_N 45.275,48.65 r90 top locked
C52 "47uF" TANT_CASE_E 49.225,9.275 r270 top locked
C53 "NA" 0805_N 50.175,36.1 r180 top locked
C54 "NA" 0805_N 50.175,33.7 r180 top locked
C55 "NA" 1608[0603] 50.45,31.65 r180 top locked
C56 "10uF" C1210_N 49.875,16.225 r270 top locked
C57 "NA" 1608[0603] 49.825,59.1 r0 top locked
C58 "100nF" 1608[0603] 50.225,12.725 r0 top locked
C59 "47uF" TANT_CASE_E 64.975,21.125 r180 top locked
C60 "47uF" TANT_CASE_E 65,16.05 r180 top locked
C62 "47uF" TANT_CASE_E 95,61.025 r0 top locked
C63 "47uF" TANT_CASE_E 95,56.025 r0 top locked
C64 "47uF" TANT_CASE_E 95,51.025 r0 top locked
C65 "47uF" TANT_CASE_E 95,46.025 r0 top locked
C66 "47uF" TANT_CASE_E 95,41.025 r0 top locked
C67 "47uF" TANT_CASE_E 95,36.025 r0 top locked
C68 "47uF" TANT_CASE_E 95,31.025 r0 top locked
C69 "47uF" TANT_CASE_E 95,26.025 r0 top locked
C70 "47uF" TANT_CASE_E 95,21.025 r0 top locked
C71 "47uF" TANT_CASE_E 95,16.025 r0 top locked
C72 "47uF" TANT_CASE_E 95,11.025 r0 top locked
C73 "10uF" 1608[0603] 15.075,18.625 r270 top
C74 "100nF" 0805_N 78.9,53.625 r90 top
C75 "100nF" 0805_N 70.85,70.475 r180 top
C76 "100nF" 0805_N 78.9,36.8 r270 top
D1 "BZT52C43" SOD123 6.55,56.15 r0 top locked
D2 "BAT54" SOT-23_N 14,56.5 r0 top locked
D3 "LED 0603" LED608L 33.175,27.175 r0 top locked
D4 "SK310A-TP" "SMA (D214AC)" 40,12.5 r180 top locked
D5 "BAS70-4" SOT-23_N 45.25,36.975 r270 top locked
D6 "BAS70-4" SOT-23_N 45.825,28.875 r270 top locked
D7 "BAS70-4" SOT-23_N 45.3,20.45 r270 top locked
D8 "NA" SOT-23_N 49.525,54.9 r180 top locked
D9 "NA" SOD123 50.025,40.65 r90 top locked
GND "PPAD" "MEC-HOLE3.2MM /5.0 MM" 73,4.35 r180 top locked
HAL "B6B-ZR(LF)(SN)" ZH-6-0150 3.5,10.5 r90 top locked
IO "2.54mm HEADER 5 PIN" CON-SRS-5-0254 36.75,37.25 r180 top locked
JTAG "2.54mm HEADER 4 PIN" CON-SRS-4-0254 36.75,34 r180 top locked
"JTAG CPLD" "2.54mm HEADER 6 PIN" CON-SRS-6-0254 36.75,40.5 r180 top locked
L1 "3.3 uH" 4030 16.25,13.25 r0 top locked value=XAL4030-332-MEB
L2 "22 uH" "3232DZ (3232)" 31,10.75 r270 top locked value=IHLP3232DZER220M11
L3 "FB 1K" 0805_N 41,61.55 r0 top locked
L4 "FB 1K" 0805_N 41.275,51.275 r0 top locked
L5 "FB 1K" 0805_N 44.2,40.125 r0 top locked
L6 "FB 1K" 1608[0603] 40.875,38.075 r180 top locked
L7 "FB 1K" 1608[0603] 40.825,30.7 r180 top locked
L8 "FB 1K" 1608[0603] 41.05,23.3 r180 top locked
L9 "NA" 1608[0603] 50.45,38 r180 top locked
L10 "FB 1K" 1608[0603] 12.05,18.475 r0 top
LINBUS "2.54mm HEADER 2 PIN" CON-SRS-2-0254 3.5,53.625 r90 top locked
PH1 "PPAD" "MEC-HOLE3.2MM /5.0 MM" 73,55.75 r0 top locked
PH2 "PPAD" "MEC-HOLE3.2MM /5.0 MM" 73,38.275 r0 top locked
PH3 "PPAD" "MEC-HOLE3.2MM /5.0 MM" 73,20.75 r0 top locked
Q1 "G-CRYS-Q12.000 MHz" "QUARTZ SMD QKT (QKT)" 32.525,21.275 r270 top locked
R1 "NA" 1608[0603] 6.75,38.75 r270 top locked
R2 "NA" 1608[0603] 7.5,36 r0 top locked
R3 "NA" 1608[0603] 9.75,43.25 r0 top locked
R4 "27R" 1608[0603] 10.5,36 r0 top locked
R5 "1K5" 1608[0603] 11,46.75 r0 top locked
R6 "1K5" 1608[0603] 10.975,45.275 r0 top locked
R7 "NA" 1608[0603] 12,42.5 r90 top locked
R8 "27R" 1608[0603] 13.8,34.275 r0 top locked
R9 "130K" 1608[0603] 13,6.75 r270 top locked
R10 "22K" 1608[0603] 13,3.75 r270 top locked
R11 "NA" 1608[0603] 14.25,27.5 r270 top locked
R12 "NA" 1608[0603] 15.75,27.5 r270 top locked
R13 "10K" 1608[0603] 17.25,27.5 r270 top locked
R14 "10K" 1608[0603] 18.75,31.75 r270 top locked
R15 "NA" 1608[0603] 23,16 r0 top locked
R16 "10K0" 1608[0603] 23.5,35.25 r0 top locked
R17 "1K0" 1608[0603] 23.5,33.75 r180 top locked
R18 "NA" 1608[0603] 23.5,30.5 r0 top locked
R19 "10K" 1608[0603] 25.25,6.75 r90 top locked
R20 "NA" 1608[0603] 28.35,30.625 r0 top locked
R21 "NA" 1608[0603] 28.35,29.15 r0 top locked
R22 "150K" 1608[0603] 31.25,16 r0 top locked
R23 "300R" 1608[0603] 33.25,69.75 r0 top locked
R24 "300R" 1608[0603] 33.25,68.25 r0 top locked
R25 "300R" 1608[0603] 33.25,59 r0 top locked
R26 "300R" 1608[0603] 33.25,57.5 r0 top locked
R27 "300R" 1608[0603] 33.25,48.5 r0 top locked
R28 "300R" 1608[0603] 33.25,47 r0 top locked
R29 "1K0" 1608[0603] 33.125,25.5 r0 top locked
R30 "1K" 1608[0603] 32.75,63 r270 top locked
R31 "10K" 1608[0603] 34.25,16 r0 top locked
R32 "1K" 1608[0603] 34.25,63 r270 top locked
R33 "100R" 1608[0603] 36.775,31.05 r270 top locked
R34 "100R" 1608[0603] 36.8,25.3 r270 top locked
R35 "1K0" 1608[0603] 38.275,31.05 r270 top locked
R36 "1K0" 1608[0603] 38.3,25.3 r270 top locked
R37 "1K0" 1608[0603] 38.325,22.5 r90 top locked
R38 "100R" 1608[0603] 38.25,16.5 r90 top locked
R39 "43K" 1608[0603] 42.75,12.25 r90 top locked
R40 "10R" 0805_N 45.525,64.35 r0 top locked
R41 "10R" 0805_N 45.5,61.725 r0 top locked
R42 "10R" 0805_N 45.5,54.25 r0 top locked
R43 "10R" 0805_N 45.5,51.75 r0 top locked
R44 "10R" 0805_N 45.45,44.975 r0 top
R45 "10R" 0805_N 45.475,42.75 r0 top locked
R46 "22K" 1608[0603] 49.825,63.75 r180 top
R47 "22K" 1608[0603] 45.85,31.525 r0 top locked
R48 "22K" 1608[0603] 45.05,24.9 r0 top locked
R49 "22K" 1608[0603] 49.825,62.175 r180 top locked
R50 "22K" 1608[0603] 49.825,60.6 r180 top locked
R51 "22K" 1608[0603] 44.825,14.75 r0 top locked
R52 "22K" 1608[0603] 45,12.55 r180 top locked
R53 "2K4" 1608[0603] 45,11.075 r0 top locked
R54 "0R" 0805_N 49.9,48.875 r180 top locked
R55 "NA" 0805_N 49.9,46.575 r180 top locked
R56 "22K" 1608[0603] 45.075,23.4 r180 top locked
R57 "22K" 1608[0603] 45.85,34.375 r180 top
R58 "22K" 1608[0603] 44.825,17.775 r180 top locked
R59 "NA" 1608[0603] 49.825,57.575 r0 top locked
R60 "R02" R7W 80.475,18 r0 top locked
R61 "R02" R7W 80.475,11.45 r0 top locked
R62 "33R" 0805_N 78.9,57.525 r90 top
R63 "33R" 0805_N 78.875,40.8 r90 top
R64 "33R" 0805_N 66.95,70.475 r180 top
RS232 "2.54mm HEADER 4 PIN" CON-SRS-4-0254 3.5,41 r90 top locked
RT1 "10K THERMISTOR" 1608[0603] 79.075,22 r180 top locked
TR1 "CSD18536KTT" "TO-263 (D2PAK)" 58.975,67 r180 top locked
TR2 "CSD18536KTT" "TO-263 (D2PAK)" 59,49.5 r180 top locked
TR3 "CSD18536KTT" "TO-263 (D2PAK)" 59,32 r180 top locked
TR4 "CSD18536KTT" "TO-263 (D2PAK)" 76.8,67 r180 top locked
TR5 "CSD18536KTT" "TO-263 (D2PAK)" 76.8,49.5 r180 top locked
TR6 "CSD18536KTT" "TO-263 (D2PAK)" 76.8,32 r180 top locked
TVS "24V" TANT_CASE_E 65.1,10.925 r180 top locked
U1 "MCP2003-E/SN" "SO8 (REFLOW)" 8.75,51.25 r90 top locked
U2 "ADS1015IDGST" "VSSOP-10 (GST)" 9,28.25 r180 top locked
U3 "AD8541AKSZ" "S_SOT23-5 (REFLOW)" 9,37.5 r0 top locked
U4 "AD8541AKSZ" "S_SOT23-5 (REFLOW)" 15.75,40.25 r180 top locked
U5 "ADM1818" SOT-23_N 14.75,31.25 r180 top locked
U6 "SPX3819M5-3.3V" "S_SOT23-5 (REFLOW)" 16.5,19.425 r270 top locked
U7 "TPS54329EDDA" "S_SO8_POWER_PAD (WAVE)" 21.25,9.5 r180 top locked
U8 "MAX3232E-Q1" TSSOP16 20.5,55.25 r90 top locked
U9 "ZXCT1082Q" "S_SOT23-5 (REFLOW)" 20.75,34.75 r90 top locked
U10 "CPLD" 32-QFN 22.5,47.5 r0 top locked value=Value
U11 "LPC1115FBD48/303,1" LQFP48_N 26,22.5 r90 top locked
U12 "SPX3819M5-1.8V" "S_SOT23-5 (REFLOW)" 29.5,47.25 r90 top locked
U13 "UCC27211" "S_SO8_POWER_PAD (WAVE)" 41.75,66 r90 top locked
U14 "UCC27211" "S_SO8_POWER_PAD (WAVE)" 41.75,55.25 r90 top locked
U15 "UCC27211" "S_SO8_POWER_PAD (WAVE)" 41.75,44.5 r90 top locked
U16 "LMR16020PDDA" "S_SO8_POWER_PAD (WAVE)" 45,5.25 r90 top locked
U17 "TL331" "S_SOT23-5 (REFLOW)" 42.525,32.275 r90 top locked
U18 "TL331" "S_SOT23-5 (REFLOW)" 42.475,24.85 r90 top locked
U19 "TL331" "S_SOT23-5 (REFLOW)" 42.65,17.475 r90 top locked
VIN1 "PPAD" "MEC-HOLE3.2MM /5.0 MM" 73,12.8 r180 top locked

## Footprints (in the part's own frame and the unit in brackets; to place one, negate y for a bottom-side part, rotate by r counter-clockwise, add the part's x,y. Pads: shape width x height; smd on the part's side, far side on the other; paste and mask are expansions set on the pad)
32-QFN [mm]
  rrect50% 0.75x0.3 smd mask+0.102: 1(-2.4,1.75)
  rrect50% 0.75x0.3 smd: 2(-2.4,1.25) 3(-2.4,0.75) 4(-2.4,0.25) 5(-2.4,-0.25) 6(-2.4,-0.75) 7(-2.4,-1.25) 8(-2.4,-1.75) 17(2.4,-1.75) 18(2.4,-1.25) 19(2.4,-0.75) 20(2.4,-0.25) 21(2.4,0.25) 22(2.4,0.75) 23(2.4,1.25) 24(2.4,1.75)
  rrect50% 0.3x0.75 smd mask+0.102: 9(-1.75,-2.4)
  rrect50% 0.3x0.75 smd: 10(-1.25,-2.4) 11(-0.75,-2.4) 12(-0.25,-2.4) 13(0.25,-2.4) 14(0.75,-2.4) 15(1.25,-2.4) 16(1.75,-2.4) 25(1.75,2.4) 26(1.25,2.4) 27(0.75,2.4) 28(0.25,2.4) 29(-0.25,2.4) 30(-0.75,2.4) 31(-1.25,2.4) 32(-1.75,2.4)
  rect 3.251x3.251 smd paste-1.613: 33(0,0)
  silkscreen extent -3.17,-2.5 2.5,3.17
0805_N [mm] "Chip Resistor, Body 2.0x1.2mm, IPC Medium Density"
  rrect50% 1.2x1.4 smd: 1(-0.9,0) 2(0.9,0)
  silkscreen extent 0,-0.6 0,0.6
1608[0603] [mm] "Chip Capacitor, Body 1.6x0.8mm, IPC High Density"
  rrect50% 0.8x0.9 smd: 1(-0.7,0) 2(0.7,0)
  silkscreen extent 0,-0.4 0,0.4
"3232DZ (3232)" [mm]
  rrect50% 2.4x5.3 smd paste-0.1 mask+0.1: 1(-0.1,0) 2(7.23,0)
  silkscreen extent -1.6,-4.2 8.75,4.2
4030 [mm]
  rrect50% 1x3.7 smd paste-0.05 mask+0.1: 1(0,0) 2(2.37,0)
  silkscreen extent -0.9,-1.75 3.3,1.75
C1210_N [mm] "Chip Capacitor, Body 3.2x2.5mm, IPC Medium Density"
  rrect50% 1.3x2.7 smd: 1(-1.45,0) 2(1.45,0)
  silkscreen extent -0.4,-1.25 0.4,1.25
CON-SRS-2-0254 [mil]
  rect 63x63 hole 35.43 paste+0 mask+5: 1(0,0)
  round 63 hole 35.43 paste+0 mask+8: 2(100,0)
  silkscreen extent -50,-50 150,50
CON-SRS-4-0254 [mil]
  rect 63x63 hole 35.43 paste+0 mask+8: 1(0,0)
  round 63 hole 35.43 paste+0 mask+8: 2(100,0) 3(200,0) 4(300,0)
  silkscreen extent -50,-50 350,50
CON-SRS-5-0254 [mil]
  rect 63x63 hole 35.43 paste+0 mask+8: 1(0,0)
  round 63 hole 35.43 paste+0 mask+8: 2(100,0) 3(200,0) 4(300,0) 5(400,0)
  silkscreen extent -50,-50 450,50
CON-SRS-6-0254 [mil]
  rect 63x63 hole 35.43 paste+0 mask+8: 1(0,0)
  round 63 hole 35.43 paste+0 mask+8: 2(100,0) 3(200,0) 4(300,0) 5(400,0) 6(500,0)
  silkscreen extent -45,-50 550,50
LED608L [mm] "Chip LED, Body 1.6x0.8mm, IPC High Density"
  oct 0.8x0.9 smd: 1(-0.7,0)
  rrect50% 0.8x0.9 smd: 2(0.7,0)
  silkscreen extent -1.4,-0.35 -1.4,0.35
LQFP48_N [mm] "Thin QFP, 48-Leads, Body 7x7mm, Pitch 0.5mm, IPC Medium Density"
  oct 1.5x0.4 smd paste+0: 1(-4.6,2.81)
  rrect50% 1.5x0.28 smd paste+0: 2(-4.6,2.25) 3(-4.6,1.75) 4(-4.6,1.25) 5(-4.6,0.75) 6(-4.6,0.25) 7(-4.6,-0.25) 8(-4.6,-0.75) 9(-4.6,-1.25) 10(-4.6,-1.75) 11(-4.6,-2.25) 26(4.6,-2.25) 27(4.6,-1.75) 28(4.6,-1.25) 29(4.6,-0.75) 30(4.6,-0.25) 31(4.6,0.25) 32(4.6,0.75) 33(4.6,1.25) 34(4.6,1.75) 35(4.6,2.25)
  rrect50% 1.5x0.4 smd paste+0: 12(-4.6,-2.81) 25(4.6,-2.81) 36(4.6,2.81)
  rrect50% 0.4x1.5 smd paste+0: 13(-2.81,-4.6) 24(2.81,-4.6) 37(2.81,4.6) 48(-2.81,4.6)
  rrect50% 0.28x1.5 smd paste+0: 14(-2.25,-4.6) 15(-1.75,-4.6) 16(-1.25,-4.6) 17(-0.75,-4.6) 18(-0.25,-4.6) 19(0.25,-4.6) 20(0.75,-4.6) 21(1.25,-4.6) 22(1.75,-4.6) 23(2.25,-4.6) 38(2.25,4.6) 39(1.75,4.6) 40(1.25,4.6) 41(0.75,4.6) 42(0.25,4.6) 43(-0.25,4.6) 44(-0.75,4.6) 45(-1.25,4.6) 46(-1.75,4.6) 47(-2.25,4.6)
  silkscreen extent -4.7,-3.3 3.43,4.83
"MEC-HOLE3.2MM /5.0 MM" [mm]
  rrect50% 7.5x5 hole 0.3: 1(0,0)
"QUARTZ SMD QKT (QKT)" [mm]
  rrect50% 2x1.2 smd paste+0 mask+0.127: 1(0,0) 3(2.7,2.6) 4(0,2.6)
  rrect50% 1.8x1.2 smd paste+0 mask+0.127: 2(2.7,0)
  silkscreen extent -1.3,0 4,2.5
R7W [mm]
  rrect50% 3.51x5.33 smd paste-0.05 mask+0.1: 1(0,0) 2(4.191,0)
  silkscreen extent -2.16,-1.78 6.35,1.78
"S_SO8_POWER_PAD (WAVE)" [mm]
  oct 0.5x2.2 smd: 1(0,0)
  rrect50% 0.5x2.2 smd: 2(1.27,0) 3(2.54,0) 4(3.81,0) 5(3.781,5.75) 6(2.54,5.75) 7(1.27,5.75) 8(0,5.75)
  rrect50% 4.5x2.5 smd paste-2 mask-2: 9(1.9,2.875)
  rrect50% 4.5x2.5 smd far side paste-100: 9(1.9,2.875)
  silkscreen extent -1.32,-0.32 4.8,4
"S_SOT23-5 (REFLOW)" [mm]
  oct 0.6x1.05 smd: 1(0,0)
  rrect50% 0.6x1.05 smd: 2(0.95,0) 3(1.9,0) 4(1.9,2.7) 5(0,2.7)
  silkscreen extent -0.55,0.19 2.46,2.69
"SMA (D214AC)" [mm]
  oct 1.8x2.2 smd paste-0.05 mask+0.1: 1(0,0)
  rrect50% 1.8x2.2 smd paste-0.05 mask+0.1: 2(3.2,0)
  silkscreen extent -1.6,-1.5 3.75,1.5
"SO8 (REFLOW)" [mm]
  oct 0.72x1.78 smd: 1(-1.905,-2.5)
  rrect50% 0.72x1.78 smd: 2(-0.635,-2.5) 3(0.635,-2.5) 4(1.905,-2.5) 5(1.905,2.5) 6(0.635,2.5) 7(-0.635,2.5) 8(-1.905,2.5)
  silkscreen extent -3.43,-2.92 2.92,1.91
SOD123 [mm]
  oct 1.2x1.2 smd paste-0.1 mask+0.1: 1(0,0)
  rrect50% 1.2x1.2 smd paste-0.1 mask+0.1: 2(3.7,0)
  silkscreen extent -0.89,-1.25 3.9,1.3
SOT-23_N [mm] "SOT23, 3-Leads, Body 2.9x1.3mm, Pitch 0.95mm, Lead Span 2.5mm, IPC Medium Density"
  rrect50% 1.15x0.6 smd: 1(-1.125,0.95) 2(-1.125,-0.95) 3(1.125,0)
  silkscreen extent -1.25,-1.5 0.7,1.92
TANT_CASE_E [mm]
  oct 2.5x4 smd paste-0.05 mask+0.1: 1(0,0)
  rrect50% 2.5x4 smd paste-0.05 mask+0.1: 2(6.3,0)
  silkscreen extent -2.43,-2.27 7.97,2.27
"TO-263 (D2PAK)" [mm]
  rect 3.82x1.05 all layers, no hole paste+0 mask+0.102: 1(0,0) 3(0,5.08)
  rect 7.48x8.55 all layers, no hole paste+0 mask+0.102: 2(-10.3,2.54)
  silkscreen extent -14.73,-2.79 2.54,7.87
TSSOP16 [mm]
  oct 0.3x1.55 smd paste+0: 1(-2.275,-2.8)
  rrect50% 0.3x1.55 smd paste+0: 2(-1.625,-2.8) 3(-0.975,-2.8) 4(-0.325,-2.8) 5(0.325,-2.8) 6(0.975,-2.8) 7(1.625,-2.8) 8(2.275,-2.8) 9(2.275,2.8) 10(1.625,2.8) 11(0.975,2.8) 12(0.325,2.8) 13(-0.325,2.8) 14(-0.975,2.8) 15(-1.625,2.8) 16(-2.275,2.8)
  silkscreen extent -3.56,-3.3 3.17,1.91
"VSSOP-10 (GST)" [mm]
  oct 1.45x0.28 smd: 1(-2.2,0.9)
  rrect50% 1.45x0.28 smd: 2(-2.2,0.4) 3(-2.2,-0.1) 4(-2.2,-0.6) 5(-2.2,-1.1) 6(2.2,-1.1) 7(2.2,-0.6) 8(2.2,-0.1) 9(2.2,0.4) 10(2.2,0.9)
  silkscreen extent -2.48,-1.7 1.5,1.98
ZH-6-0150 [mm]
  rect 1.25x1.25 hole 0.7: 1(0,0)
  round 1.25 hole 0.7: 2(1.5,0) 3(3,0) 4(4.5,0) 5(6,0) 6(7.5,0)
  silkscreen extent -1.5,-2.5 9,1.5

## Part data
ADC: library part "HEADER 5P S MALE", "HEADER SINGLE ROW 4P STRAIGHT MALE", (OldCtfName)=(CTF_OLD_NAME_INVALID), Elec_type=ON_BOARD_CONNECTOR
BOOT LINBUS: library part "HEADER 2P S MALE", "HEADER SINGLE ROW 2P STRAIGHT MALE", (OldCtfName)=(CTF_OLD_NAME_INVALID), Elec_type=ON_BOARD_CONNECTOR
C1 C2 C3 C4 C6 C7 C11 C12 C14 C27 C29 C73: library part C100n-10%-0603, "10uF Surface mount CAP 0603 10% 25V", Tolerance=10%, Voltage=25V, (OldCtfName)=(CTF_OLD_NAME_INVALID)
C5 C18 C23 C32 C33 C41 C53 C54: library part C10u-10%-0805, "4.7uF Surface mount CAP 0805 10% 50V", Tolerance=10%, Voltage=50V, (OldCtfName)=(CTF_OLD_NAME_INVALID)
C8 C16 C17 C24 C25 C26 C34 C35 C40 C45 C55 C58: library part C100n-10%-0603, "100nF Surface mount CAP 0603 10% 50V", Tolerance=10%, Voltage=50V, (OldCtfName)=(CTF_OLD_NAME_INVALID)
C9: library part C22-10%-0805, "22pF Surface mount CAP 0805 10% 25V", Tolerance=10%, Voltage=25V, (OldCtfName)=(CTF_OLD_NAME_INVALID)
C10 C13 C15 C19 C20 C28: library part C10u-10%-0805, "10uF Surface mount CAP 0603 10% 25V", Tolerance=10%, Voltage=25V, (OldCtfName)=(CTF_OLD_NAME_INVALID)
C21: library part C8n2-10%-0603, "8.2nF Surface mount  CAP 0603 10% 25V", Tolerance=10%, Voltage=25V, (OldCtfName)=(CTF_OLD_NAME_INVALID)
C22: library part C470n-10%-0805, "470nF Surface mount  CAP 0805 10% 25V", Tolerance=10%, Voltage=25V, (OldCtfName)=(CTF_OLD_NAME_INVALID)
C30: library part C12-10%-0805, "12pF Surface mount CAP 10% 25V", Tolerance=10%, Voltage=50V, (OldCtfName)=(CTF_OLD_NAME_INVALID)
C31 C38: library part C10-10%-0603, "10pF Surface mount CAP 10% 25V", Tolerance=10%, Voltage=25V, (OldCtfName)=(CTF_OLD_NAME_INVALID)
C36 C37 C39: library part C100-10%-0603, Tolerance=10%, Voltage=25V, (OldCtfName)=(CTF_OLD_NAME_INVALID)
C42 C43 C44: library part C100n-10%-0603, "4.7uF Surface mount CAP 0805 10% 50V", Tolerance=10%, Voltage=50V, (OldCtfName)=(CTF_OLD_NAME_INVALID)
C46 C47 C48 C57: library part C100-10%-0603, Tolerance=10%, (OldCtfName)=(CTF_OLD_NAME_INVALID), Voltage=NA
C49 C50 C51: library part C10uF/63V-1210, "4.7uF Surface mount CAP 0805 10% 50V", Tolerance=20%, Voltage=50V, (OldCtfName)=(CTF_OLD_NAME_INVALID)
C52 C59 C62 C63 C64 C65 C66 C67 C68 C69 C70 C71 C72 TVS: library part C330uF-63V--Polar, "CAP, TANT, 15UF, 50V, CASE E - TR3E156M050C0300", Tolerance=20%, Voltage=50V, (OldCtfName)=(CTF_OLD_NAME_INVALID)
C56: library part C10u-10%-0805, "10uF Surface mount CAP 1210 10% 63V", Tolerance=10%, Voltage=63V, (OldCtfName)=(CTF_OLD_NAME_INVALID)
C60: library part C330uF-63V--Polar, "CAP, TANT, 15UF, 50V, CASE E - TR3E156M050C0300", MANUF CODE=T495X476K035ATE200, Tolerance=20%, Voltage=50V, (OldCtfName)=(CTF_OLD_NAME_INVALID)
C74 C75 C76: library part C10u-10%-0805, "100nF Surface mount CAP 0805 10% 50V", Tolerance=10%, Voltage=50V, (OldCtfName)=(CTF_OLD_NAME_INVALID)
D1: "ZENER DIODE 43V - BZT52C43", Manufacturer=DIODES, (OldCtfName)=(CTF_OLD_NAME_INVALID)
D2: library part "Diode BAT17", "Schottki Diode BAT54", ComponentLink1Description="Manufacturer Link", ComponentLink1URL=http://www.infineon.com/, ComponentLink2Description=Datasheet, ComponentLink2URL=http://www.infineon.com/upload/Document/cmc_upload/documents/009/363/bat17series.pdf, DatasheetVersion=Oct-1999, LatestRevisionDate=29-May-2009, LatestRevisionNote="IPC-7351 Footprint Added.", Note="Pin 2 is not connected and not drawn.", PackageDescription="3-Pin SOT-23 Package 0.95 mm Pitch, 2.5 mm Lead Span", PackageReference=SOT-23, PackageVersion=Sep-2001, Published=21-Mar-2003, Publisher="Altium Limited"
D3: library part KPT-1608SRC-PRV, "LED RED 0603 - KPT-1608SRC-PRV", Manufacturer=KINGBRIGHT, (OldCtfName)=(CTF_OLD_NAME_INVALID)
D4: "SHOTTKY DIODE SK310A-TP 100V/3A", Manufacturer=MCC, (OldCtfName)=(CTF_OLD_NAME_INVALID)
D5 D6 D7 D8: library part "Diode BAS70-04", "Dual Schottky BAS70-4", ComponentLink1Description="Manufacturer Link", ComponentLink1URL=http://www.infineon.com/, ComponentLink2Description=Datasheet, ComponentLink2URL=http://www.infineon.com/upload/Document/cmc_upload/documents/009/363/bat17series.pdf, DatasheetVersion=Oct-1999, LatestRevisionDate=29-May-2009, LatestRevisionNote="IPC-7351 Footprint Added.", Note="Pin 2 is not connected and not drawn.", PackageDescription="3-Pin SOT-23 Package 0.95 mm Pitch, 2.5 mm Lead Span", PackageReference=SOT-23, PackageVersion=Sep-2001, Published=21-Mar-2003, Publisher="Altium Limited"
D9: library part BZT52C43, "ZENER DIODE 24V", Manufacturer=DIODES, (OldCtfName)=(CTF_OLD_NAME_INVALID)
GND PH1 PH2 PH3 VIN1: library part "I-GAT 3.2/5 mm", "Power Pad", (OldCtfName)=(CTF_OLD_NAME_INVALID)
HAL: library part "HEADER 6P S MALE", "HEADER SINGLE ROW 6P STRAIGHT MALE 1.5mm", (OldCtfName)=(CTF_OLD_NAME_INVALID), Elec_type=ON_BOARD_CONNECTOR
IO: library part "HEADER 5P S MALE", "HEADER SINGLE ROW 5P STRAIGHT MALE", (OldCtfName)=(CTF_OLD_NAME_INVALID), Elec_type=ON_BOARD_CONNECTOR
JTAG RS232: library part "HEADER 4P S MALE", "HEADER SINGLE ROW 4P STRAIGHT MALE", (OldCtfName)=(CTF_OLD_NAME_INVALID), Elec_type=ON_BOARD_CONNECTOR
"JTAG CPLD": library part "HEADER 6P S MALE", "HEADER SINGLE ROW 6P STRAIGHT MALE", (OldCtfName)=(CTF_OLD_NAME_INVALID), Elec_type=ON_BOARD_CONNECTOR
L1: library part XAL4030-332-MEB, "INDUCTOR 3.3 uH - XAL4030-332-MEB", Tolerance=20%, (OldCtfName)=(CTF_OLD_NAME_INVALID), Elec_type=XAL4030-332-MEB
L2: library part IHLP3232DZER220M11, "Inductor 22 uH - IHLP3232DZER220M11", Tolerance=20%, (OldCtfName)=(CTF_OLD_NAME_INVALID), Elec_type=IHLP3232DZER220M11
L3 L4 L5: library part XAL4030-332-MEB, "Ferrite Bead 1K 0805", Tolerance=20%, (OldCtfName)=(CTF_OLD_NAME_INVALID), Elec_type="ferrite bead"
L6 L7 L8 L9 L10: library part XAL4030-332-MEB, "Ferrite Bead 1K 0603", Tolerance=20%, (OldCtfName)=(CTF_OLD_NAME_INVALID), Elec_type="ferrite bead"
Q1: library part Q-12MHz-QKT_SMD, "Crystal 12.000 MHz as per cx21", (OldCtfName)=(CTF_OLD_NAME_INVALID)
R1 R2 R4 R7 R8 R16 R17: library part R1K0-1%-0603, "1K0 SMD 0603 1%", Tolerance=1%, (OldCtfName)=(CTF_OLD_NAME_INVALID), Wattage=0.065W
R3: library part R3K9-1%-0603, "3K9 SMD 0603 1%", Tolerance=1%, (OldCtfName)=(CTF_OLD_NAME_INVALID), Wattage=0.065W
R5 R6: library part R1K5-1%-0805, "1K5 SMD 0603 1%", Tolerance=1%, (OldCtfName)=(CTF_OLD_NAME_INVALID), Wattage=0.125W
R9: library part R130K-1%-0805, "130K SMD 0603 1%", Tolerance=1%, (OldCtfName)=(CTF_OLD_NAME_INVALID), Wattage=0.065W
R10 R46 R49 R50 R56 R57 R58: library part R22K-1%-0603, "22K SMD 0603 1%", Tolerance=1%, (OldCtfName)=(CTF_OLD_NAME_INVALID), Wattage=0.065W
R11 R12: library part R4K7-1%-0603, "4K7 SMD 0603 1%", Tolerance=1%, (OldCtfName)=(CTF_OLD_NAME_INVALID), Wattage=0.065W
R13 R14 R15 R18 R19 R20 R21 R30 R31 R32: library part R10K-1%-0603, "10K SMD 0603 1%", Tolerance=1%, (OldCtfName)=(CTF_OLD_NAME_INVALID), Wattage=0.065W
R22: library part R150K-1%-0805, "150K SMD 0603 1%", Tolerance=1%, (OldCtfName)=(CTF_OLD_NAME_INVALID), Wattage=0.25W
R23 R24 R25 R26 R27 R28: library part R300-1%-0603, "300R SMD 0603 1%", Tolerance=1%, (OldCtfName)=(CTF_OLD_NAME_INVALID), Wattage=0.065W
R29: library part R2K0-1%-0603, "1K0 SMD 0603 1%", Tolerance=1%, (OldCtfName)=(CTF_OLD_NAME_INVALID), Wattage=0.065W
R33 R34 R38: library part R100-1%-0603, "100R SMD 0603 1%", Tolerance=1%, (OldCtfName)=(CTF_OLD_NAME_INVALID), Wattage=0.065W
R35 R36 R37: library part R100-1%-0603, "1K0 SMD 0603 1%", Tolerance=1%, (OldCtfName)=(CTF_OLD_NAME_INVALID), Wattage=0.065W
R39: library part R43K-1%-0603, "43K SMD 0603 1%", Tolerance=1%, (OldCtfName)=(CTF_OLD_NAME_INVALID), Wattage=0.065W
R40 R41 R42 R43 R44 R45 R62 R63 R64: library part R33-1%-0805, "4R7 SMD 0805 1%", Tolerance=1%, (OldCtfName)=(CTF_OLD_NAME_INVALID), Wattage=0.25W
R47 R48 R51: library part R4K7-1%-0603, "NA", Tolerance=1%, (OldCtfName)=(CTF_OLD_NAME_INVALID), Wattage=NA
R52: library part R2K0-1%-0603, "22K SMD 0603 1%", Tolerance=1%, (OldCtfName)=(CTF_OLD_NAME_INVALID), Wattage=0.065W
R53: library part R20K-1%-0603, "1K5 SMD 0603 1%", Tolerance=1%, (OldCtfName)=(CTF_OLD_NAME_INVALID), Wattage=0.065W
R54: library part R43K-1%-0603, "0R SMD 1210 1%", Tolerance=1%, (OldCtfName)=(CTF_OLD_NAME_INVALID), Wattage=0.065W
R55: library part R100-1%-0603, "1K0 SMD 0805 1%", Tolerance=1%, (OldCtfName)=(CTF_OLD_NAME_INVALID), Wattage=0.065W
R59: library part R10K-1%-0603, Tolerance=1%, (OldCtfName)=(CTF_OLD_NAME_INVALID), Wattage=NA
R60: library part R10K-1%-0603, "R02 7W", Tolerance=1%, (OldCtfName)=(CTF_OLD_NAME_INVALID), Wattage=7W
R61: library part R10K-1%-0603, "R02 7W WSHM2818R0200FEB", Tolerance=1%, (OldCtfName)=(CTF_OLD_NAME_INVALID), Wattage=7W
RT1: library part R10K-1%-0603, "10K SMD THERMISTOR NTCS0603E3103JHT 0603 1%", Tolerance=1%, (OldCtfName)=(CTF_OLD_NAME_INVALID), Wattage=0.065W
TR1 TR2 TR3 TR4 TR5 TR6: "N-CHANNEL MOSFET DPAK", Manufacturer=TI, (OldCtfName)=(CTF_OLD_NAME_INVALID)
U1: "LIN DRIVER MCP2003-E/SN", Manufacturer=MICROCHIP, (OldCtfName)=(CTF_OLD_NAME_INVALID)
U2: "4 CHANNEL AD CONVERTER - DO NOT POPULATE!!!", Manufacturer=TI, (OldCtfName)=(CTF_OLD_NAME_INVALID)
U3 U4: "OPERATIONAL AMP AD8541AKSZ - SOT23", Manufacturer="ANALOG DEVICES", (OldCtfName)=(CTF_OLD_NAME_INVALID)
U5: "MCU Reset IC ADM1818", DatasheetVersion=Oct-1999, LatestRevisionDate=29-May-2009, LatestRevisionNote="IPC-7351 Footprint Added.", Note="Pin 2 is not connected and not drawn.", PackageDescription="3-Pin SOT-23 Package 0.95 mm Pitch, 2.5 mm Lead Span", PackageReference=SOT-23, PackageVersion=Sep-2001, Published=21-Mar-2003
U6: library part SPX1819M5-3.3V, "POS VOLTAGE REGULATOR FIXED 3.3V", Manufacturer=EXAR, (OldCtfName)=(CTF_OLD_NAME_INVALID)
U7 U16: "POS STEP DOWN CONVERTER ADJUSTABLE", Manufacturer=TI, (OldCtfName)=(CTF_OLD_NAME_INVALID)
U8: library part MAX232D, "RS-232 TRANSCEIVER", Manufacturer=TEXAS, thm_power_diss=0.2275, (OldCtfName)=(CTF_OLD_NAME_INVALID)
U9: "CURRENT MIRROR ZXCT1082Q", Manufacturer="DIODES Inc", (OldCtfName)=(CTF_OLD_NAME_INVALID)
U10: library part XC2C32A-6QFG32C, "CPLD - XC2C32A-6QFG32C", DigiKeyPartNumber=122-1412-ND, Operating_Temperature="0°C ~ 70°C", Package_/_Case="32-VFQFN Exposed Pad", Supplier_Device_Package="32-QFN Exposed Pad (5x5)", Voltage=1.8V, Voltage_Supply_-_Internal="1.7 V ~ 1.9 V", C="Copyright (C) 2015 Accelerated Designs. All rights reserved", Copyright="Copyright (C) 2015 Accelerated Designs. All rights reserved", DataSheet=http://www.xilinx.com/support/documentation/data_sheets/ds310.pdf, Delay_Time_tpd(1)_Max=5.5ns, Features=Programmable, Manufacturer_Part_Number=XC2C32A-6QFG32C, Memory_Type=CMOS, Mounting_Type="Surface Mount", Names,_Registered_&amp;_Trademark_Names="CoolRunner II", Names_Registered_&amp;_Trademark_Names="CoolRunner II", Number_of_Gates=750, Number_of_I_/O=21, Number_of_Logic_Blocks/Elements=-, Number_of_Logic_Elements/Blocks=2, Number_of_Macrocells=32, Packaging=Tray, Programmable_Type="In System Programmable", Quantity_Available=6031, RefDes=RefDes, Type=Type, Vendor="Xilinx Inc"
U11: library part LPC1114-LQFP-48, "NXP ARM 32BIT MPU", Manufacturer=NXP, (OldCtfName)=(CTF_OLD_NAME_INVALID)
U12: library part SPX1819M5-3.3V, "POS VOLTAGE REGULATOR SPX3819M5-1.8V", Manufacturer=EXAR, (OldCtfName)=(CTF_OLD_NAME_INVALID)
U13 U14 U15: "DOUBLE MOSFET DRIVED", Manufacturer=TI, (OldCtfName)=(CTF_OLD_NAME_INVALID)
U17 U18 U19: "COMPARATOR TL331", Manufacturer="ANALOG DEVICES", (OldCtfName)=(CTF_OLD_NAME_INVALID)

## Via types
v1: diameter 0.3, hole 0.3, Top_Elec to Bottom_GND, 352 vias
v2: diameter 0.8, hole 0.5, Top_Elec to Bottom_GND, 262 vias
v3: diameter 0.35, hole 0.2, Top_Elec to Bottom_GND, 140 vias
v4: diameter 0.5, hole 0.5, Top_Elec to Bottom_GND, 40 vias
v5: diameter 6/6/6/6 (per signal layer), hole 3.2, Top_Elec to Bottom_GND, 4 vias
v6: diameter 5/5/5/5 (per signal layer), hole 3.2, Top_Elec to Bottom_GND, 1 vias

## Nets (pads, with @x,y where several pads share a name; then routed paths per layer and width w, separated by ;. In a path a pad name is that pad's centre, name@x,y a point inside that pad or via, vN(x,y) a via of type N, cw(c..) or ccw(c..) an arc to the next point about the centre after c; other vN are vias at no path point)
1.8V: C29.1 U10.20 U12.5 | length 4.1
  Top_Elec w0.254: U10.20@24.9,47.25 U12.5@26.8,47.25 C29.1@26.8,45
30: R40.1 U13.3 | length 7.1
  Top_Elec w0.5: U13.3@41.75,68.54 v2(43.46,68.54) ; v2(43.5,64.25) R40.1@44.6,64.25
  Mid Top Layer w0.5: v2(43.46,68.54) 43.46,64.29 v2(43.5,64.25)
31: R41.1 U13.8 | length 10.8
  Top_Elec w0.5: v2(36,65.285) U13.8@36,66 ; v2(43.5,61.75) R41.1@44.6,61.75
  Bottom_GND w0.5: v2(36,65.285) 37.365,65.285 40.9,61.75 v2(43.5,61.75)
32: C49.1 U13.2 | length 3.6
  Top_Elec w0.5: U13.2@41.75,67.27 44.17,67.27 44.675,67.775 44.9,67.775 C49.1@45.05,67.925
36Vin: C52.1 C56.2 C58.1 R54.2 R55.2 U16.2 U16.3 | length 48.8
  Top_Elec w1: 44.35,7.15 48.725,7.15 49.225,7.65 C52.1@49.225,9.275 ; R54.2@49,48.875 R55.2@49,46.575 49,46.525 49.038,46.487 47.975,45.425 47.975,19.175 47.575,18.775 47.575,16.225 C56.2@49.15,14.65 ; C52.1@49.15,9.975 C52.1@49.65,9.475 ; C52.1@49.45,9.1 49.45,14.35 C56.2@49.875,14.775
38: C50.1 U14.2 | length 3.8
  Top_Elec w0.5: U14.2@41.75,56.52 45.47,56.52 C50.1@45.5,56.55
40: R42.1 U14.3 | length 6.4
  Top_Elec w0.5: U14.3@41.75,57.79 v2(43.21,57.79) ; v2(43.25,54.25) R42.1@44.6,54.25
  Mid Top Layer w0.5: v2(43.21,57.79) 43.21,54.29 v2(43.25,54.25)
41: R43.1 U14.8 | length 10.5
  Top_Elec w0.5: v2(36,54.5) U14.8@36,55.25 ; v2(43.5,51.75) R43.1@44.6,51.75
  Bottom_GND w0.5: v2(36,54.5) 38.675,51.825 43.425,51.825 v2(43.5,51.75)
48: C51.1 U15.2 | length 4.2
  Top_Elec w0.5: U15.2@41.75,45.77 43.27,45.77 45.15,47.65 C51.1@45.175,47.65
50: R44.1 U15.3 | length 6.6
  Top_Elec w0.5: U15.3@41.75,47.04 43.04,47.04 v2(43.5,47.5) ; v2(43.5,44.25) 43.525,44.25 44.5,45.225 R44.1@44.55,45.225
  Mid Top Layer w0.5: v2(43.5,44.25) v2(43.5,47.5)
51: R45.1 U15.8 | length 10.8
  Top_Elec w0.5: v2(36,43.75) U15.8@36,44.5 ; v2(43.5,41.75) 43.525,41.75 43.525,41.775 44.625,42.875 R45.1@44.625,42.975
  Bottom_GND w0.5: v2(36,43.75) 37.025,42.725 42.525,42.725 v2(43.5,41.75)
73: R39.1 U16.4 | length 4.1
  Top_Elec w0.35: R39.1@43,11.75 42.75,11.5 42.75,10.75 44.44,9.06 U16.4@45,9.06
78: C30.2 R22.2 R31.1 U16.5 | length 14.6
  Top_Elec w0.254: R31.1@33.6,16 R31.1@33.55,16 R22.2@31.95,16 31.95,15.65 32.6,15 32.6,14.1 37.8,14.1 38.4,13.5 38.4,11.1 39.2,10.3 U16.5@39.2,9.1
91: C9.2 R9.2 R10.1 U7.5 | length 7.7
  Top_Elec w0.254: R10.1@13,4.45 R9.2@13,6.05 13.7,6.05 14,5.75 14.85,5.75 C9.2@15,5.6
  Top_Elec w0.5: C9.2@15,5.6 15,4.5 15.75,3.75 U7.5@17.469,3.75
98: C45.2 D4.2 L2.2 U16.8 | length 4.8
  Top_Elec w0.5: U16.8@39.25,5.25 39.25,2.75 C45.2@41.55,2.75
100: C45.1 U16.1 | length 4
  Top_Elec w0.5: C45.1@42.95,2.75 44.025,2.75 45,3.725 U16.1@45,5.25
103: R19.1 U7.7 | length 9.4
  Top_Elec w0.254: U7.7@19.98,3.75 19.98,2.52 20.4,2.1 22.1,2.1 22.575,2.575 22.575,4.075 23.75,5.25 24.75,5.25 25.25,5.75 R19.1@25.25,6.05
104: C22.1 U7.6 | length 8.1
  Top_Elec w0.3: U7.6@18.71,3.75 18.71,2.365 19.575,1.5 22.75,1.5 23.6,2.35 C22.1@24.75,2.35
106: C21.2 U7.8 | length 3.7
  Top_Elec w0.3: U7.8@21.25,3.75 21.25,4.25 23.05,6.05 C21.2@23.75,6.05
107: C16.2 L1.2 U7.3 | length 8.3
  Top_Elec w0.254: L1.2@18.5,13.1 18.5,14 18.95,14.45 C16.2@20.75,14.45 ; L1.2@18.635,13.265 L1.2@18.71,13.19
  Top_Elec w0.8: L1.2@18.598,12.97 18.71,12.97 L1.2@18.71,13.19 ; U7.3@18.71,8.8 L1.2@18.71,13.325
108: C16.1 U7.1 | length 3.7
  Top_Elec w0.254: C16.1@20.8,13 20.8,12.375 21.25,11.925 U7.1@21.25,9.5
122: R33.1 R35.1 U17.4 | length 4.9
  Top_Elec w0.254: R33.1@36.8,31.8 38.3,31.8 38.3,33.3 39.175,34.175 U17.4@39.825,34.175
124: C46.1 D5.3 R46.2 R47.1 R57.1 U17.3 | length 41.1
  Top_Elec w0.254: U17.3@42.525,34.175 42.525,34.925 42.788,35.188 v3@42.788,35.213 ; R47.1@45.15,31.575 45.175,31.6 45.175,33.05 46.55,34.425 v3(45.8,35.175) 45.25,35.725 D5.3@45.25,35.85 ; D5.3@45.3,36 v3(45.3,36.675) ; v3(47.5,63.275) 47.925,63.275 48.375,63.725 R46.2@49.125,63.725
  Bottom_GND w0.254: v3(42.8,35.175) v3(45.8,35.175) ; v3(45.3,36.675) 45.3,36.725 47.923,39.348 47.923,49.777 46.05,51.65 46.05,61.85 v3@47.5,63.3